# Altium PCB COREV1.1_pcb5_0.PcbDoc (part 1 of 14)
Units mil, origin at the board's own origin, x right, y up, seen from the top; angles counter-clockwise.
Board outline 2860 x 2420 mil, 6 copper layers (Top Layer, GND, SIGNAL_1, SIGNAL_2, POWER, Bottom Layer); 110 components, 241 nets, 882 pads, 697 vias.
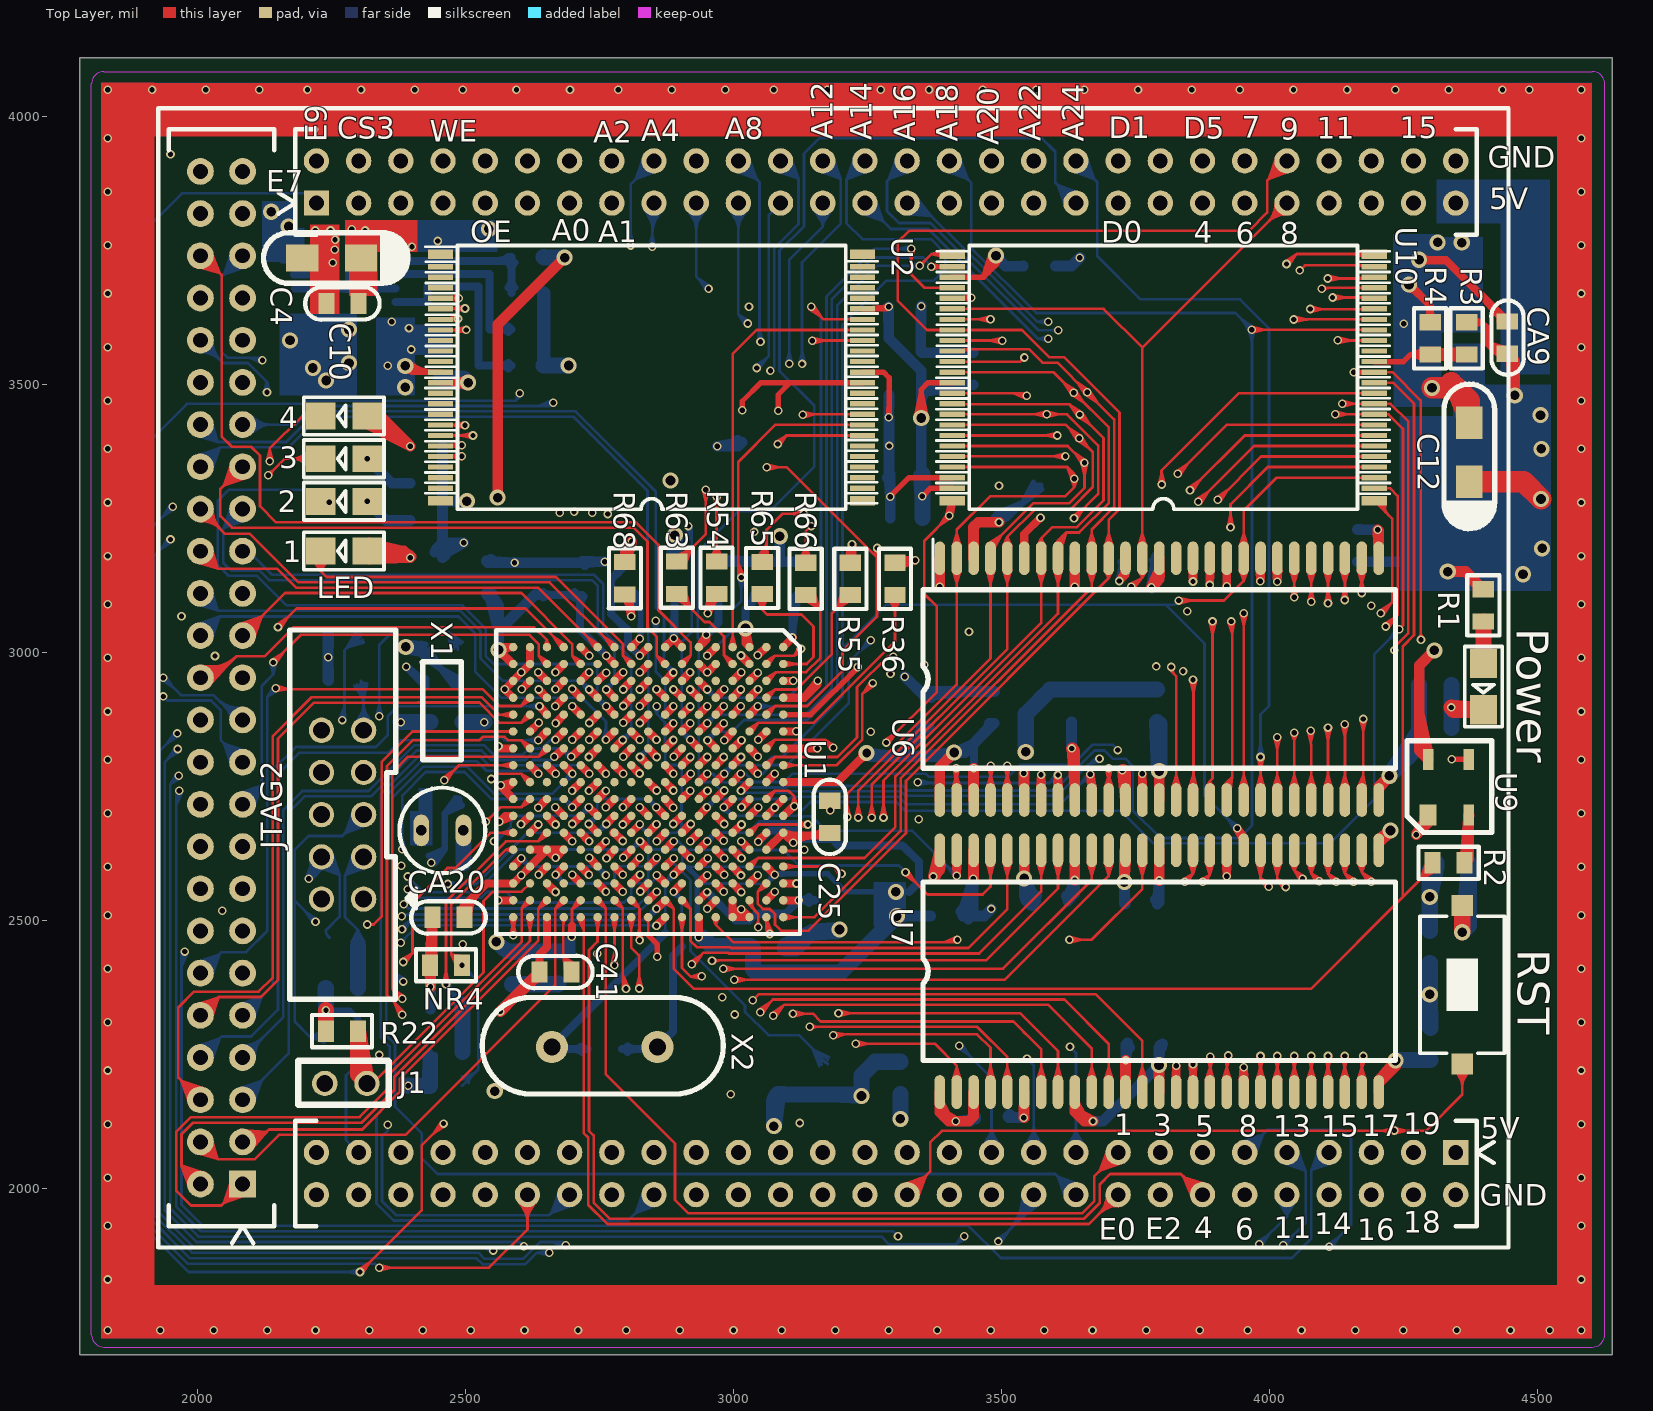
[diagram p0: Top Layer view]
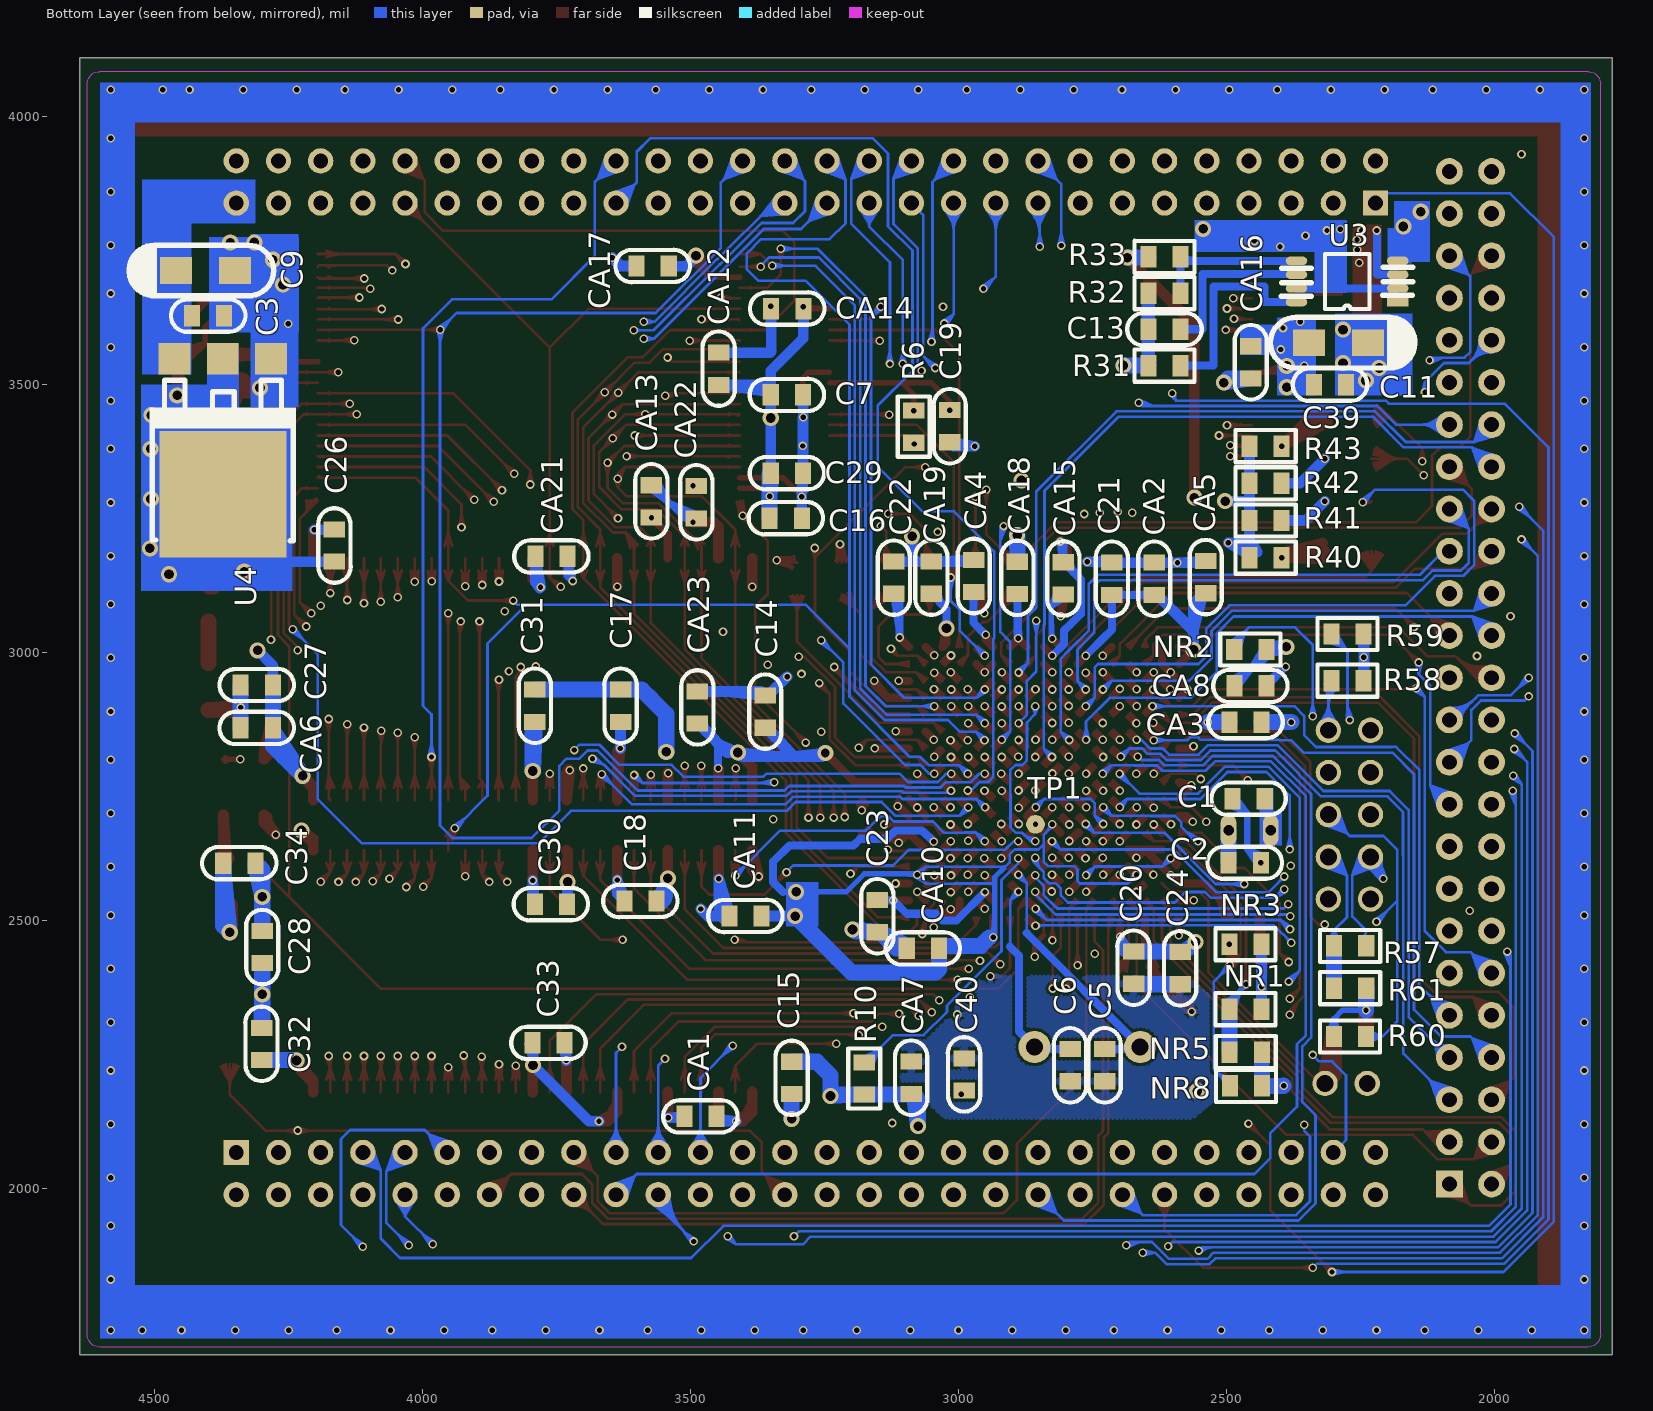
[diagram p1: Bottom Layer view, seen from below]
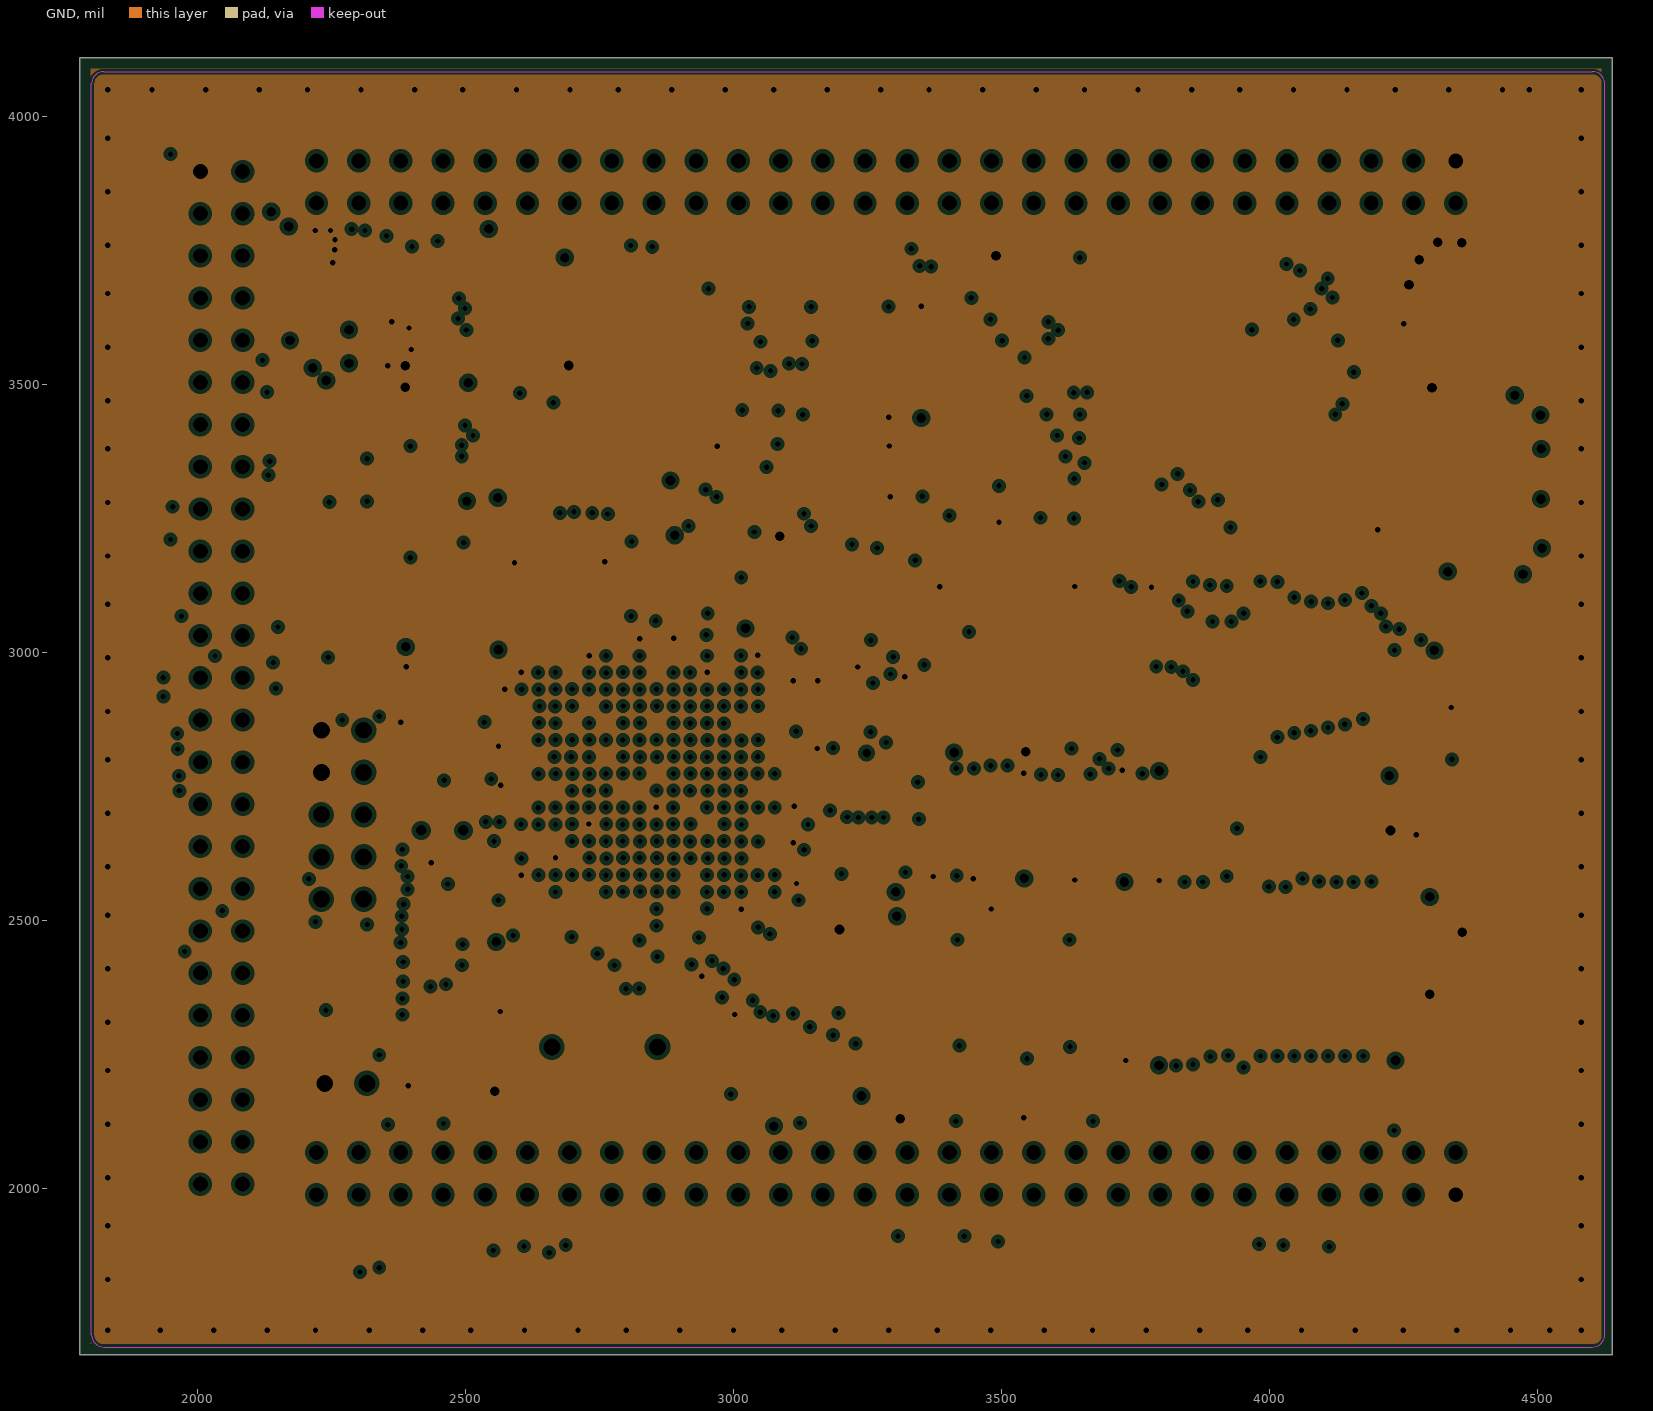
[diagram p2: GND, clearances drawn from the general rule]
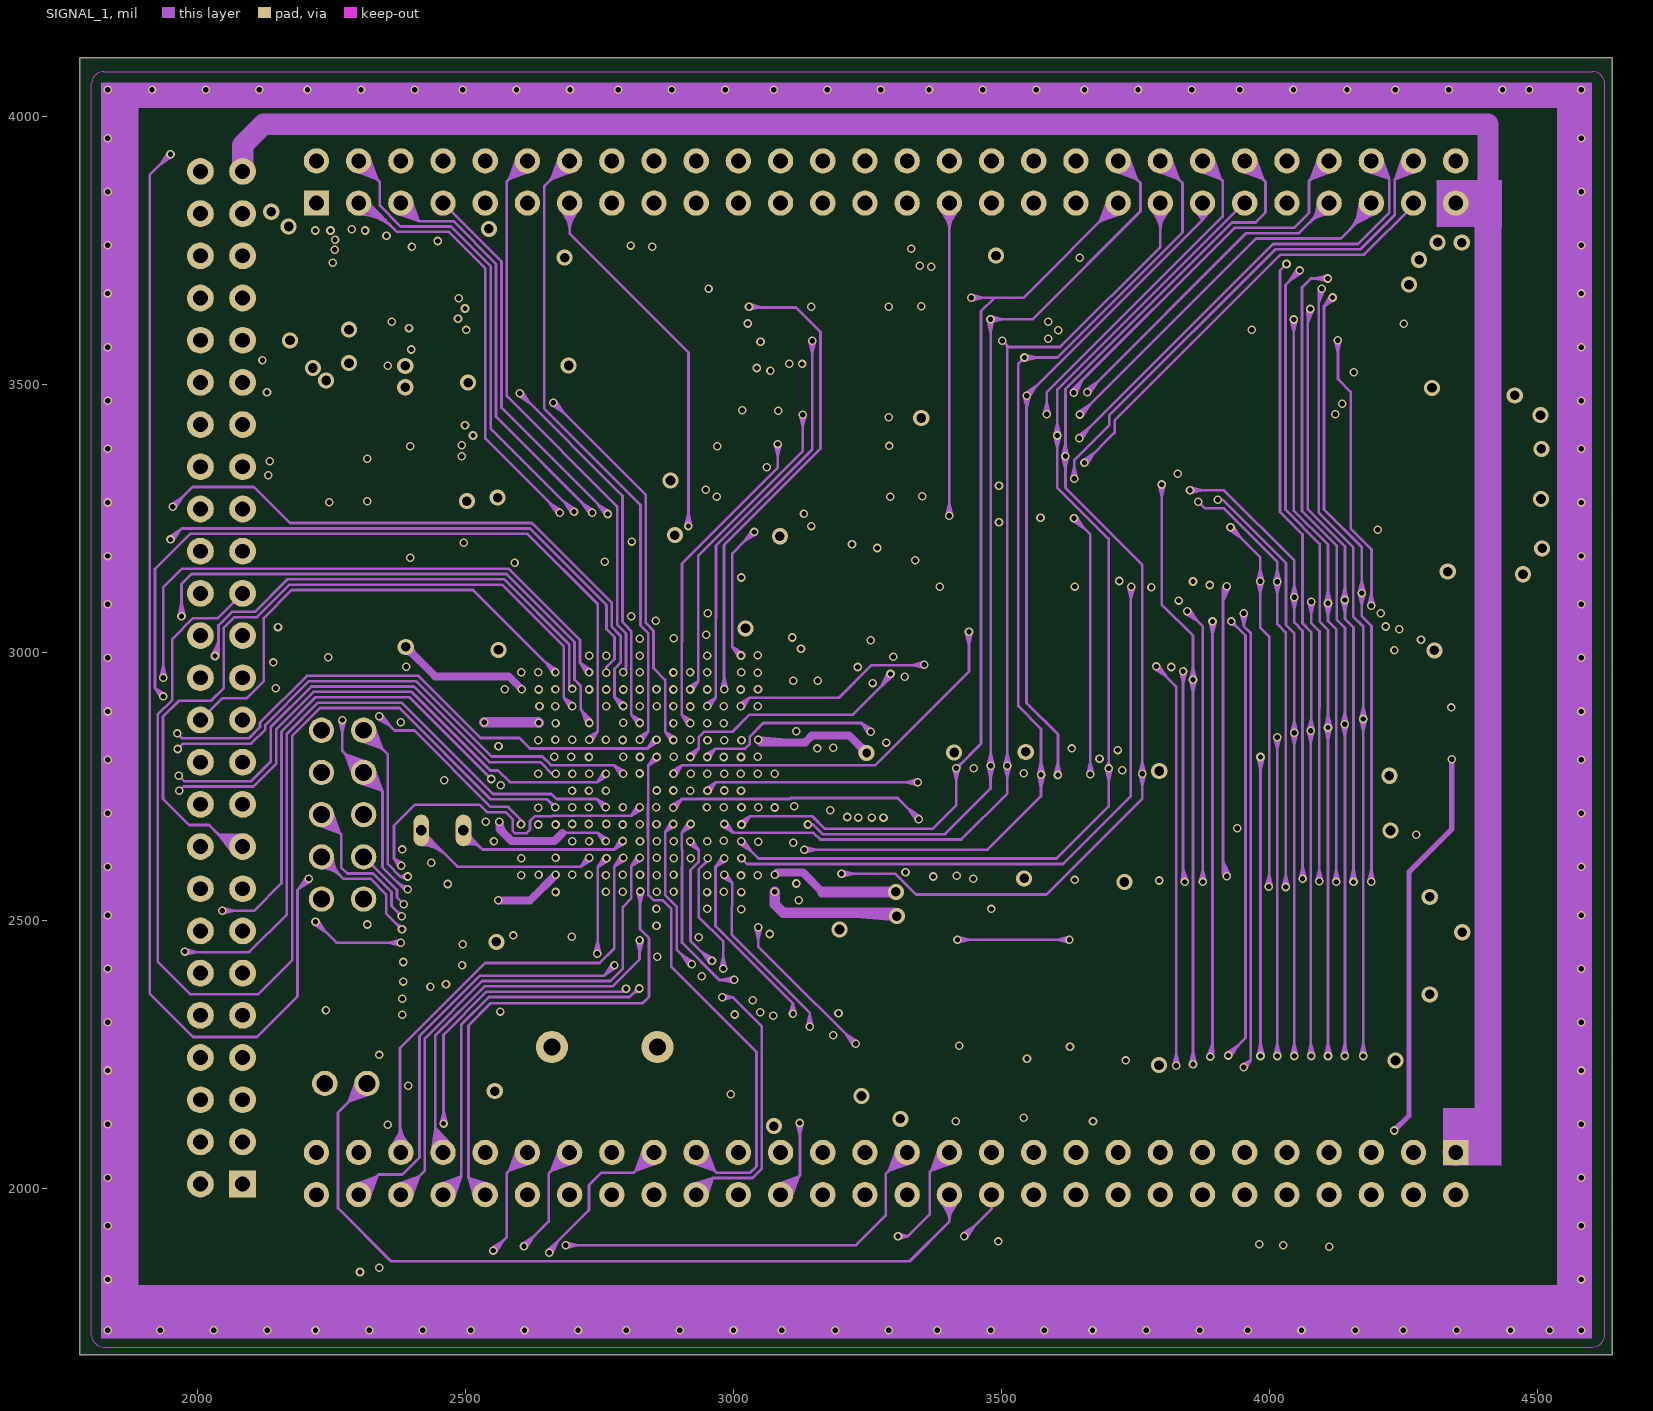
[diagram p3: SIGNAL_1]
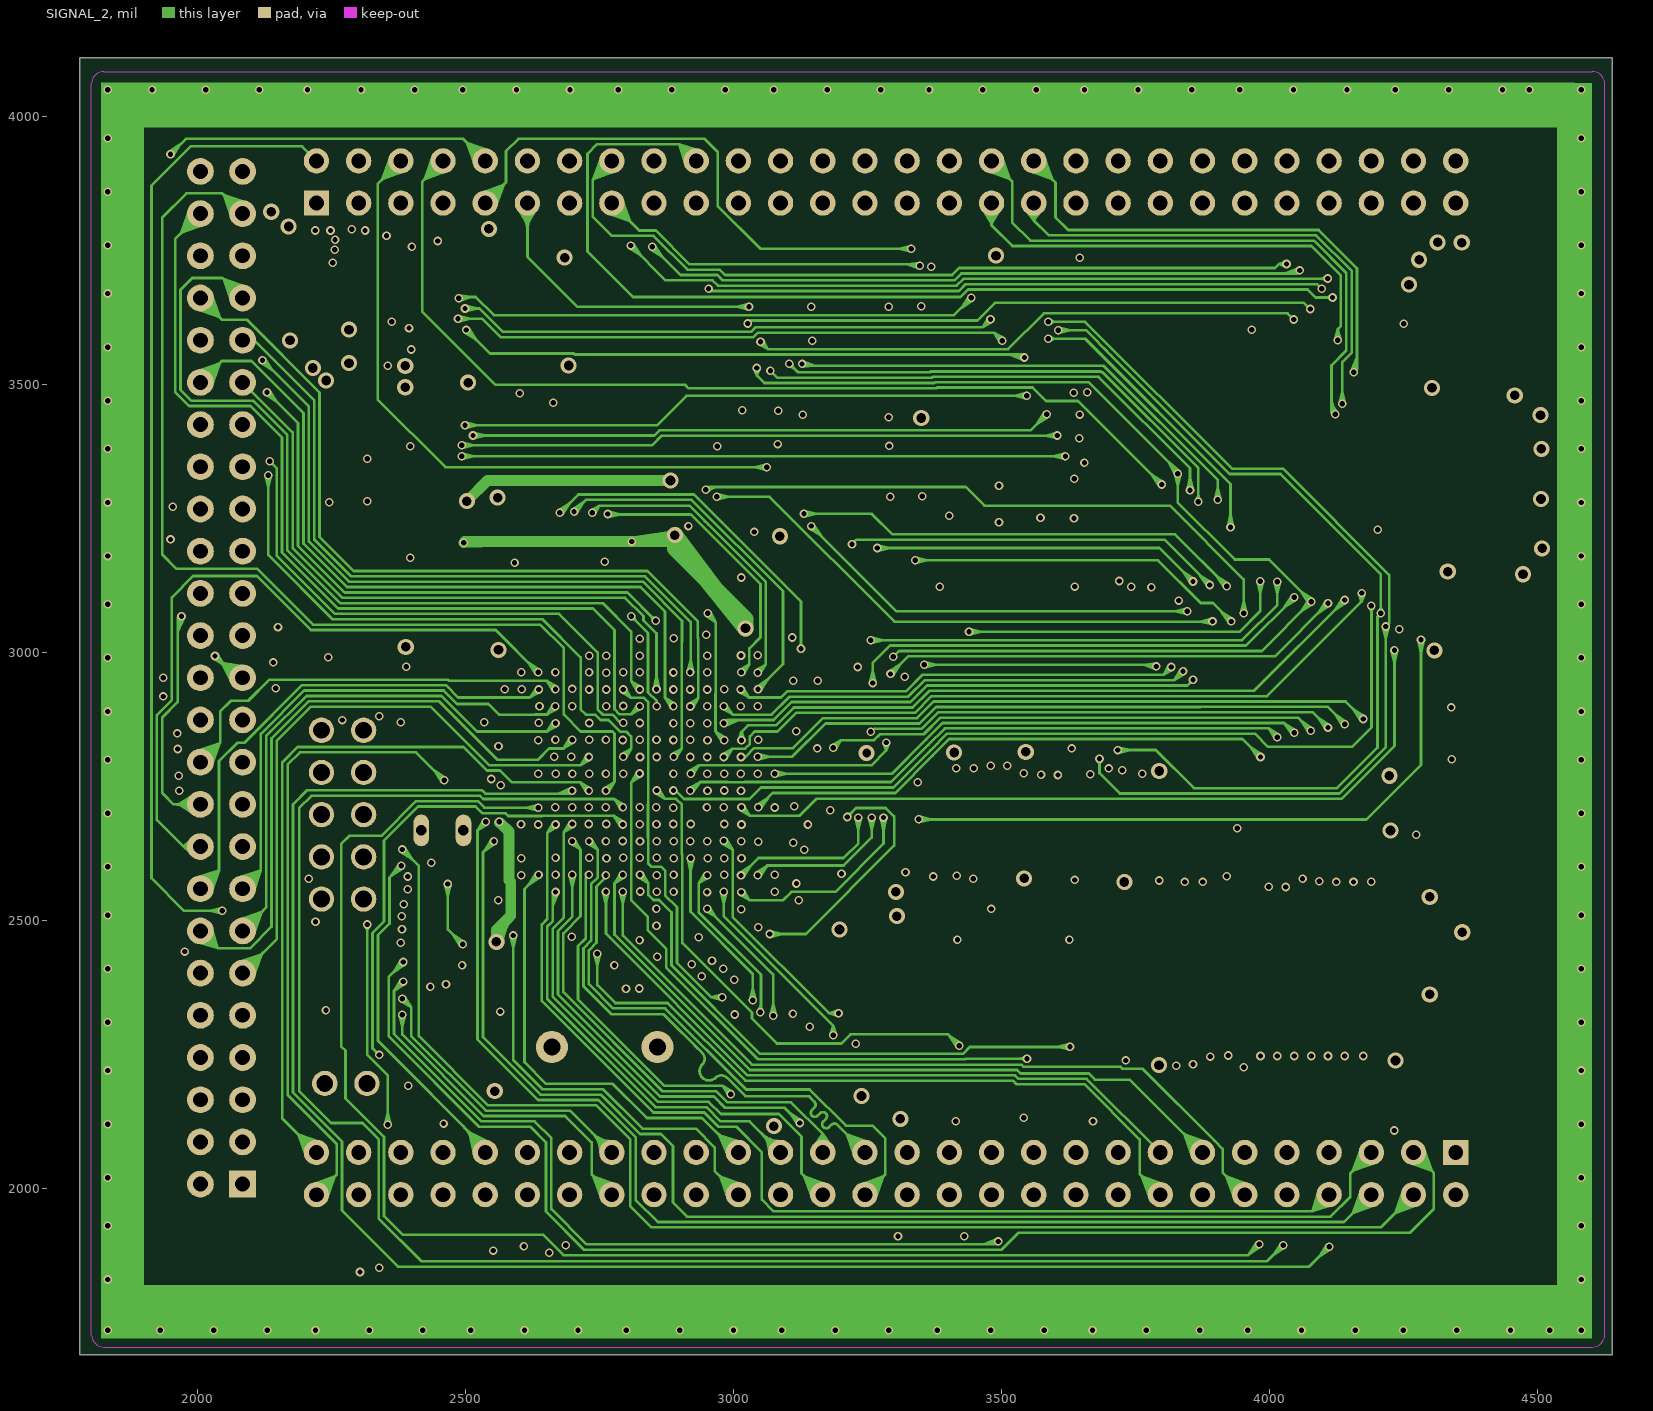
[diagram p4: SIGNAL_2]
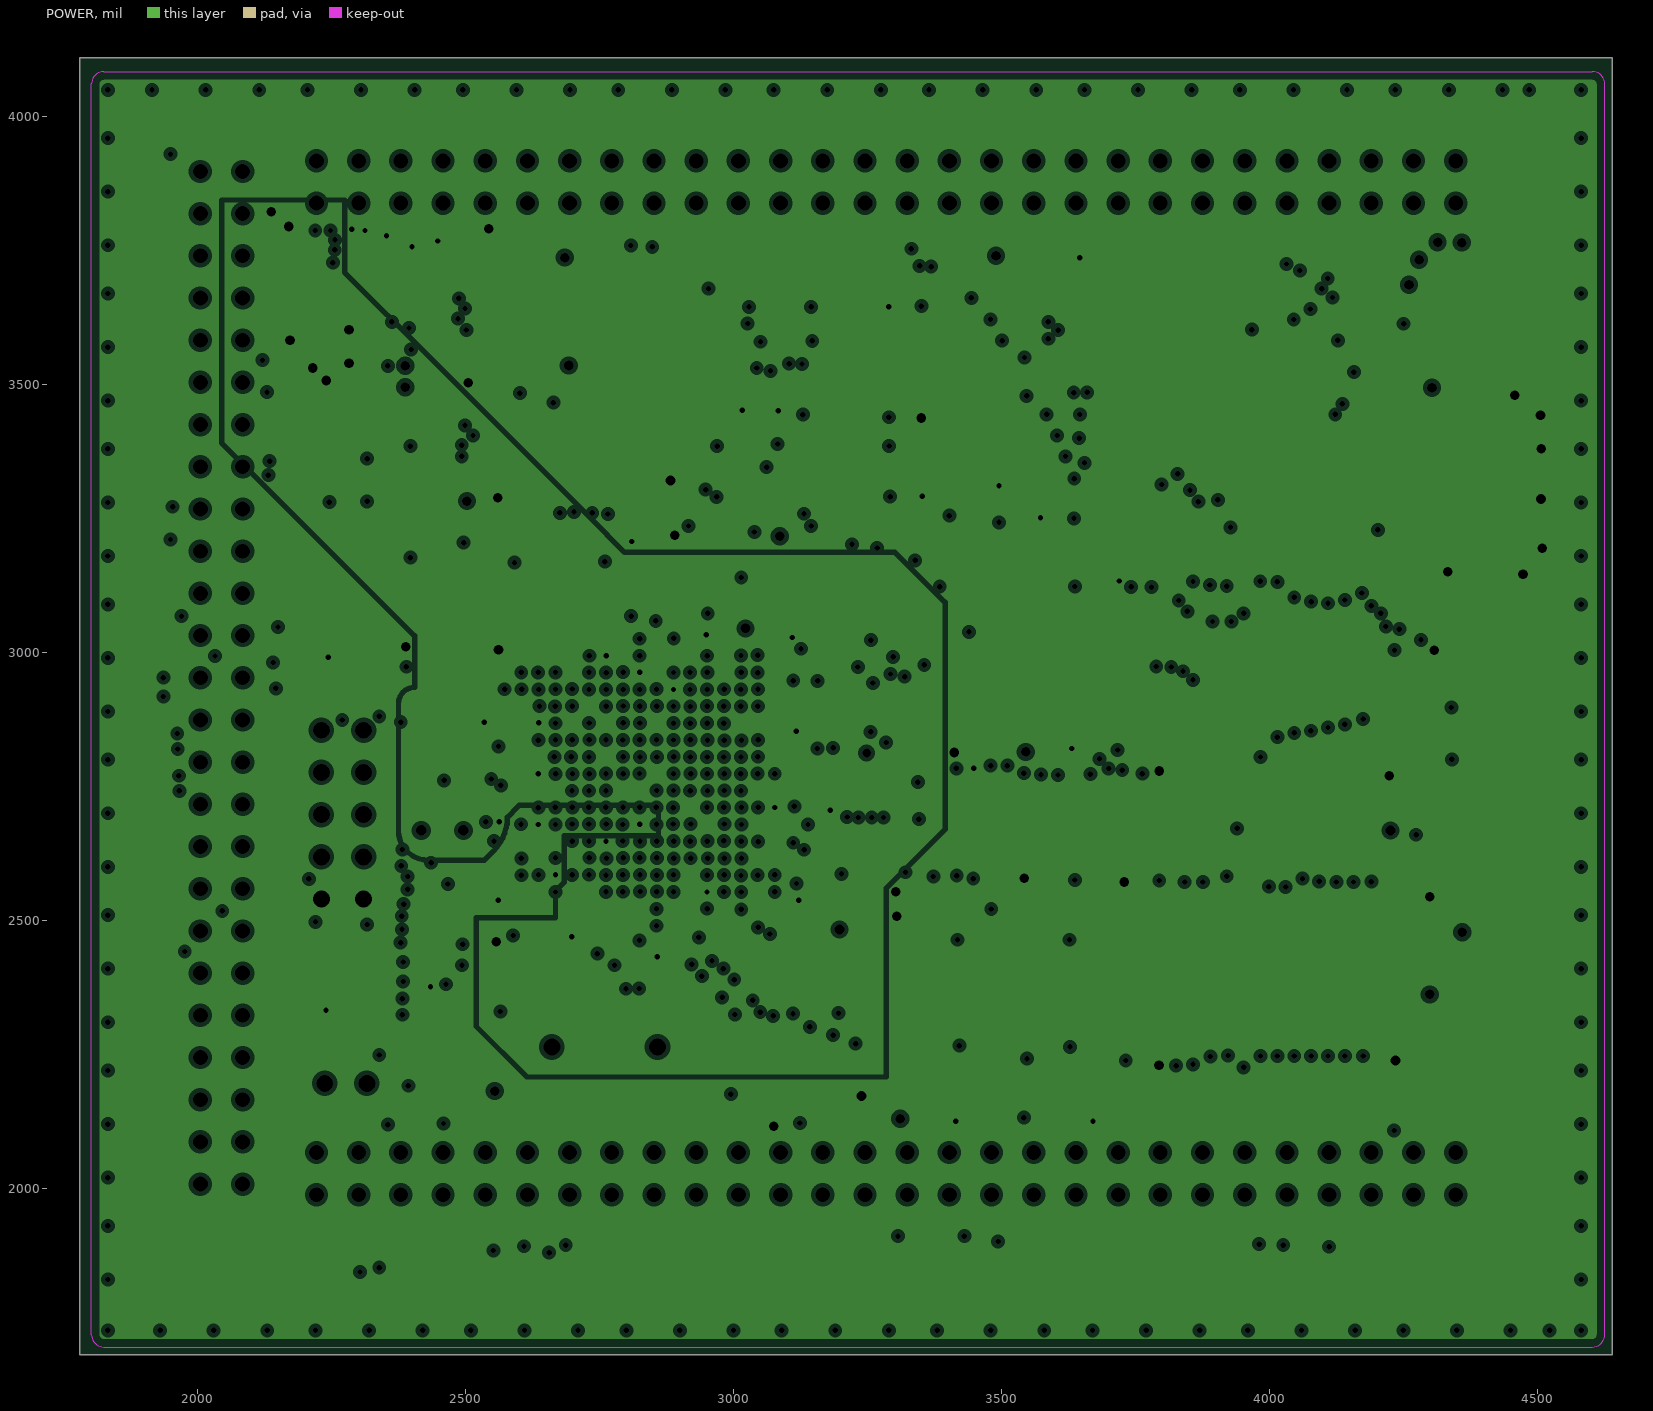
[diagram p5: POWER, clearances drawn from the general rule]

## Layer stack, top to bottom
Top Layer: signal copper 1.4
Dielectric: core 12.6, FR-4, Dk 4.8
GND: plane copper 1.4, net GND
Dielectric: prepreg 12.6, FR-4, Dk 4.8
SIGNAL_1: signal copper 1.4
Dielectric: core 12.6, FR-4, Dk 4.8
SIGNAL_2: signal copper 1.4
Dielectric: prepreg 12.6, FR-4, Dk 4.8
POWER: plane copper 1.4, net (Multiple Nets)
Dielectric: core 12.6, FR-4, Dk 4.8
Bottom Layer: signal copper 1.4

## Board outline
1780,4110 1780,3870 1780,1690 2080,1690 4640,1690 4640,1920 4640,4110

## Design rules (kind name [scope] priority, off if disabled: settings)
Clearance [All] p1: gap=5
ComponentClearance [All vs InNet('No Net')] p1: gap=10 collisioncheckmode=3 verticalgap=10 showdistances=FALSE
FabricationTestPointUsage TestPointUsage [All] p1: valid=0 allowmultiple=FALSE
FabricationTestpoint Testpoint [(IsPad And (OnTopLayer Or OnBottomLayer))] p1: side=3 testpointundercomponent=TRUE minsize=40 maxsize=100 preferedsize=60 minholesize=20 maxholesize=40 preferedholesize=32 testpointgrid=1 allowsidetop=TRUE allowsidebottom=TRUE usegrid=TRUE gridtolerance=0.01
ParallelSegment [All] p1: limit=70503.27 gap=5
PlaneClearance PlaneClearance_1 [(InNet('VDD33V') AND IsPolygon)] p1: clearance=30
PlaneClearance [All] p2: clearance=8
PlaneConnect [All] p1: planeconnectstyle=Direct reliefexpansion=10 reliefentries=4 reliefconductorwidth=10 reliefairgap=5
PolygonConnect [All] p1: connectstyle=Relief reliefconductorwidth=10 reliefentries=4 polygonreliefangle="90 Angle"
RoutingLayers [All] p1: top layer_v5=FALSE mid layer 1_v5=FALSE mid layer 2_v5=FALSE bottom layer_v5=FALSE
RoutingVias 33V [InNet('VDD33V')] p1: holewidth=28 width=50 viastyle="Through Hole" minholewidth=10 minwidth=16 maxholewidth=18 maxwidth=30
RoutingVias RoutingVias_1 [InNet('GND')] p2: holewidth=28 width=45 viastyle="Through Hole" minholewidth=10 minwidth=16 maxholewidth=18 maxwidth=30
RoutingVias [All] p3: holewidth=10 width=16 viastyle="Through Hole" minholewidth=10 minwidth=16 maxholewidth=30 maxwidth=50
SilkscreenOverComponentPads [All] p1: minsilkscreentomaskgap=10
SolderMaskExpansion [All] p1: expansion=4
Width Width_1 [InNet('VDD1.25V') And InNet('VDD33V') And InNet('GND') And InNet('VDD5V')] p1: maxlimit=50 minlimit=5 preferedwidth=12
Width [All] p2: maxlimit=50 minlimit=5 preferedwidth=5
21 further rules are at their usual default settings.

## Classes and differential pairs
net class Data: LDATA0 LDATA1 LDATA2 LDATA3 LDATA4 LDATA5 LDATA6 LDATA7 LDATA8 LDATA9 LDATA10 LDATA11 LDATA12 LDATA13 LDATA14 LDATA15 LDATA16 LDATA17 LDATA18 LDATA19 LDATA20 LDATA21 LDATA22 LDATA23 LDATA24 LDATA25 LDATA26 LDATA27 LDATA28 LDATA29 LDATA30 LDATA31
net class Addr: LADDR0 LADDR1 LADDR2 LADDR3 LADDR4 LADDR5 LADDR6 LADDR7 LADDR8 LADDR9 LADDR10 LADDR11 LADDR12 LADDR13 LADDR14 LADDR15 LADDR16 LADDR17 LADDR18 LADDR19 LADDR20 LADDR21 LADDR22 LADDR23 LADDR24 LADDR25
component class 01-CPU1: C1 C2 C5 C6 C34 C40 C41 J1 R2 R22 R68 RST U1 U9 X1 X2
component class 02-CPU2: 1 2 3 4 JTAG2 NR1 NR2 NR3 NR4 NR5 NR8 R36 R40 R41 R42 R43 R54 R55 R57 R58 R59 R60 R61 R63 R65 R66
component class 03-CPU3: C1 C3 C4 C5 C6 C7 C9 C11 C12 C13 C14 C15 C16 C17 C18 C19 C20 C21 C22 C23 C24 C25 C29 C39 C40 C41 CA1 CA2 CA3 CA4 CA5 CA6 CA7 CA8 CA9 CA10 CA11 CA12 CA13 CA14 CA15 CA16 CA17 CA18 CA19 CA20 CA21 CA22 CA23 Power R1 R2 R10 R22 R31 R32 R33 TP1 U3 U4 U6 U7
component class 04-MEM: C3 C9 C10 C18 C24 C26 C27 C28 C29 C30 C31 C32 C33 CAT2440 R3 R4 R6 R54 R63 R66 U1 U2 U3 U6 U7 U9 U10
net class SDRAM_CTL: LNSCAS LNSCS0 LNSRAS LNWBE0 LNWBE1 LNWBE2 LNWBE3 LNWE LSCKE LSCLK0 LSCLK1

## Components (designator, comment, footprint, x,y, rotation, side; value= is the part's Value field where it differs from the comment)
1 "GREEN" LED 2315.5,3189 r180 top locked (schematic designator LED1)
2 "GREEN" LED 2315.5,3281.67 r180 top locked (schematic designator LED2)
3 "GREEN" LED 2315.5,3361.33 r180 top locked (schematic designator LED3)
4 "GREEN" LED 2315.5,3441 r180 top locked (schematic designator LED4)
C1 "22p" 0603A 2429,2728 r0 bottom locked
C2 "22p" 0603A 2495.5,2607 r180 bottom locked
C3 "100nF" 0603A 4430,3628 r180 bottom locked
C4 "10uF/10V" 3216A 2306,3737 r0 top locked
C5 "15p" 0603A 2728,2259.5 r270 bottom locked
C6 "15p" 0603A 2792.5,2259.5 r270 bottom locked
C7 "100nF" 0603A 3350,3480 r180 bottom locked
C9 "10uF" 3216A 4461,3712 r0 bottom locked
C10 "0.1uF" 0603A 2300,3652 r180 top locked
C11 "10uF/10V" 3216A 2235,3579 r180 bottom locked
C12 "10uF" 3216A 4374,3318 r270 top locked
C13 "33nF/6.3V" 0603A 2585.88,3603.92 r0 bottom locked
C14 "100nF" 0603A 3360,2860 r90 bottom locked
C15 "100nF" 0603A 3312,2236 r270 bottom locked
C16 "100nF" 0603A 3352,3250 r180 bottom locked
C17 "100nF" 0603A 3630,2871 r90 bottom locked
C18 "100nF" 0603A 3564,2537 r0 bottom locked
C19 "100nF" 0603A 3017,3452 r270 bottom locked
C20 "100nF" 0603A 2674,2441.5 r270 bottom locked
C21 "100nF" 0603A 2713.2,3108 r90 bottom locked
C22 "100nF" 0603A 3120,3110 r90 bottom locked
C23 "100nF" 0603A 3152.07,2537.66 r270 bottom locked
C24 "100nF" 0603A 2587,2440.5 r270 bottom locked
C25 "100nF" 0603A 3179,2723 r270 top
C26 "100nF" 0603A 4164,3170 r90 bottom locked
C27 "100nF" 0603A 4280,2940 r0 bottom locked
C28 "100nF" 0603A 4300,2480 r270 bottom locked
C29 "100nF" 0603A 3350,3334 r180 bottom locked
C30 "100nF" 0603A 3731,2531 r0 bottom locked
C31 "100nF" 0603A 3790,2871 r90 bottom locked
C32 "100nF" 0603A 4300,2240 r90 bottom locked
C33 "100nF" 0603A 3795,2271 r180 bottom locked
C34 "104" 0603A 4312.5,2607.59 r0 bottom locked
C39 "100nF" 0603A 2277,3500.5 r0 bottom locked
C40 "2n7" 0603A 2989,2183 r90 bottom locked
C41 "680p" 0603A 2697.5,2404.5 r180 top
CA1 "100nF" 0603A 3452,2135 r0 bottom locked
CA2 "100nF" 0603A 2634.09,3108 r90 bottom locked
CA3 "100nF" 0603A 2494.23,2869.5 r180 bottom locked
CA4 "100nF" 0603A 2971,3113 r90 bottom locked
CA5 "100nF" 0603A 2538,3111 r90 bottom locked
CA6 "100nF" 0603A 4280,2860 r0 bottom locked
CA7 "100nF" 0603A 3087.75,2176.89 r90 bottom
CA8 "100nF" 0603A 2485,2937 r180 bottom
CA9 "100nF" 0603A 4445,3558 r90 top locked
CA10 "100nF" 0603A 3037,2448.5 r0 bottom locked
CA11 "100nF" 0603A 3368,2509 r0 bottom locked
CA12 "100nF" 0603A 3447,3500 r90 bottom locked
CA13 "100nF" 0603A 3572.5,3252.5 r90 bottom locked
CA14 "100nF" 0603A 3290,3642.5 r0 bottom locked
CA15 "100nF" 0603A 2805,3168 r270 bottom locked
CA16 "100nF" 0603A 2454,3512 r90 bottom locked
CA17 "100nF" 0603A 3600.39,3720.65 r180 bottom locked
CA18 "100nF" 0603A 2891,3169 r270 bottom locked
CA19 "100nF" 0603A 3050,3110 r90 bottom locked
CA20 "100nF" 0603A 2438.5,2505 r0 top locked
CA21 "100nF" 0603A 3730,3180 r0 bottom locked
CA22 "100nF" 0603A 3490,3310 r270 bottom locked
CA23 "100nF" 0603A 3486.61,2867.85 r90 bottom locked
J1 "CON2" SIP2S 2315,2196 r180 top locked
JTAG2 "HEADER 5X2" IDC10S 2310,2540 r90 top locked
NR1 "10K" 0603R 2434,2333 r0 bottom locked
NR2 "10K" 0603R 2425,3004 r0 bottom
NR3 "10K" 0603R 2434,2454 r0 bottom locked
NR4 "10K" 0603R 2433,2418 r0 top locked
NR5 "1K" 0603R 2494.5,2255.91 r180 bottom locked
NR8 "1K" 0603R 2494,2193 r180 bottom locked
Power "RED" LED 4400,2979 r270 top locked
R1 "330" 0603R 4401,3118.5 r270 top locked
R2 "470" 0603R 4365,2606 r180 top locked
R3 "10K" 0603R 4369.86,3616.77 r270 top locked
R4 "10K" 0603R 4298.5,3555.77 r90 top locked
R6 "10K" 0603R 3082,3452 r270 bottom locked
R10 "15K" 0603R 3177.5,2174.5 r90 bottom
R22 "4.7K" 0603R 2239,2295 r0 top locked
R31 "0" 0603R 2646.11,3537 r180 bottom locked
R32 "100K(1%)" 0603r 2646.11,3672.22 r180 bottom locked
R33 "10(1%)" 0603r 2585.12,3736.62 r0 bottom locked
R36 "22" 0603R 3303,3168 r270 top locked
R40 "1K" 0603R 2396.55,3175.5 r0 bottom locked
R41 "1K" 0603R 2396.55,3244.83 r0 bottom locked
R42 "1K" 0603R 2396.55,3314.17 r0 bottom locked
R43 "1K" 0603R 2396.55,3383.5 r0 bottom locked
R54 "22" 0603R 2970,3170 r270 top locked
R55 "22" 0603R 3219.67,3168 r270 top locked
R57 "1K" 0603R 2299.68,2454 r180 bottom locked
R58 "10K" 0603R 2243.69,2946 r0 bottom locked
R59 "10K" 0603R 2243.69,3033 r0 bottom locked
R60 "10K" 0603R 2300,2285 r180 bottom locked
R61 "10K" 0603R 2238.69,2372 r0 bottom locked
R63 "22" 0603R 2896,3170 r270 top locked
R65 "22" 0603R 3055,3169.61 r270 top locked
R66 "22" 0603R 3136.33,3168 r270 top locked
R68 "4.7K" 0603R 2799.06,3169.12 r270 top locked
RST "SW-PB" SW-PB2 4360,2380 r90 top locked
TP1 "CON1" TP1 2840,2600 r90 bottom locked
U1 "S3C2440X" BGA289 3092.5,3010 r270 top locked
U2 "K9Fxx08" TSOP48 3240,3287.5 r180 top locked
U3 "MAX8860EUA18" MSOP8 2181,3654 r0 bottom locked
U4 "LM1117-33" TO-252 4463,3548 r0 bottom locked
U6 "HY57V561620FTP-H" TSOP54 3385,2725 r90 top locked
U7 "HY57V561620FTP-H" TSOP54 3385,2180 r90 top locked
U9 "MAX811" MAX811 4296,2749 r90 top locked
U10 "AM29LV160DB/SST39VF1601" TSOP48 4195,3287.5 r180 top locked
X1 "32.768kHz" XTAL-B 2456,2668 r180 top locked
X2 "12M" OSC2PR-1 2858,2264 r180 top locked

## Footprints (in the part's own frame and the unit in brackets; to place one, negate y for a bottom-side part, rotate by r counter-clockwise, add the part's x,y. Pads: shape width x height; smd on the part's side, far side on the other; paste and mask are expansions set on the pad)
0603A [mil]
  rect 30x40 smd: 1(-0.39,0.65) 2(59.61,0.65)
  silkscreen extent -40,-30 99,31
0603R [mil]
  rect 30x40 smd: 1(0.5,-1.59) 2(60.5,-1.59)
  silkscreen extent -26,-32 87,28
0603r [mil]
  rect 30x40 smd: 1(0.5,-1.59) 2(60.5,-1.59)
  silkscreen extent -26,-32 87,28
3216A [mil]
  rect 60x50 smd: 1(-0.8,-0.83) 2(-110.8,-0.83)
  silkscreen extent -183,-48 87,46
BGA289 [mm]
  round 0.4 smd: A1(-0.003,0.009) A2(0.797,0.009) A3(1.597,0.009) A4(2.397,0.009) A5(3.197,0.009) A6(3.997,0.009) A7(4.797,0.009) A8(5.597,0.009) A9(6.397,0.009) A10(7.197,0.009) A11(7.997,0.009) A12(8.797,0.009) A13(9.597,0.009) A14(10.397,0.009) A15(11.197,0.009) A16(11.997,0.009) A17(12.797,0.009) B1(-0.003,-0.791) B2(0.797,-0.791) B3(1.597,-0.791) B4(2.397,-0.791) B5(3.197,-0.791) B6(3.997,-0.791) B7(4.797,-0.791) B8(5.597,-0.791) B9(6.397,-0.791) B10(7.197,-0.791) B11(7.997,-0.791) B12(8.797,-0.791) B13(9.597,-0.791) B14(10.397,-0.791) B15(11.197,-0.791) B16(11.997,-0.791) B17(12.797,-0.791) C1(-0.003,-1.591) C2(0.797,-1.591) C3(1.597,-1.591) C4(2.397,-1.591) C5(3.197,-1.591) C6(3.997,-1.591) C7(4.797,-1.591) C8(5.597,-1.591) C9(6.397,-1.591) C10(7.197,-1.591) C11(7.997,-1.591) C12(8.797,-1.591) C13(9.597,-1.591) C14(10.397,-1.591) C15(11.197,-1.591) C16(11.997,-1.591) C17(12.797,-1.591) D1(-0.003,-2.391) D2(0.797,-2.391) D3(1.597,-2.391) D4(2.397,-2.391) D5(3.197,-2.391) D6(3.997,-2.391) D7(4.797,-2.391) D8(5.597,-2.391) D9(6.397,-2.391) D10(7.197,-2.391) D11(7.997,-2.391) D12(8.797,-2.391) D13(9.597,-2.391) D14(10.397,-2.391) D15(11.197,-2.391) D16(11.997,-2.391) D17(12.797,-2.391) E1(-0.003,-3.191) E2(0.797,-3.191) E3(1.597,-3.191) E4(2.397,-3.191) E5(3.197,-3.191) E6(3.997,-3.191) E7(4.797,-3.191) E8(5.597,-3.191) E9(6.397,-3.191) E10(7.197,-3.191) E11(7.997,-3.191) E12(8.797,-3.191) E13(9.597,-3.191) E14(10.397,-3.191) E15(11.197,-3.191) E16(11.997,-3.191) E17(12.797,-3.191) F1(-0.003,-3.991) F2(0.797,-3.991) F3(1.597,-3.991) F4(2.397,-3.991) F5(3.197,-3.991) F6(3.997,-3.991) F7(4.797,-3.991) F8(5.597,-3.991) F9(6.397,-3.991) F10(7.197,-3.991) F11(7.997,-3.991) F12(8.797,-3.991) F13(9.597,-3.991) F14(10.397,-3.991) F15(11.197,-3.991) F16(11.997,-3.991) F17(12.797,-3.991) G1(-0.003,-4.791) G2(0.797,-4.791) G3(1.597,-4.791) G4(2.397,-4.791) G5(3.197,-4.791) G6(3.997,-4.791) G7(4.797,-4.791) G8(5.597,-4.791) G9(6.397,-4.791) G10(7.197,-4.791) G11(7.997,-4.791) G12(8.797,-4.791) G13(9.597,-4.791) G14(10.397,-4.791) G15(11.197,-4.791) G16(11.997,-4.791) G17(12.797,-4.791) H1(-0.003,-5.591) H2(0.797,-5.591) H3(1.597,-5.591) H4(2.397,-5.591) H5(3.197,-5.591) H6(3.997,-5.591) H7(4.797,-5.591) H8(5.597,-5.591) H9(6.397,-5.591) H10(7.197,-5.591) H11(7.997,-5.591) H12(8.797,-5.591) H13(9.597,-5.591) H14(10.397,-5.591) H15(11.197,-5.591) H16(11.997,-5.591) H17(12.797,-5.591) J1(-0.003,-6.391) J2(0.797,-6.391) J3(1.597,-6.391) J4(2.397,-6.391) J5(3.197,-6.391) J6(3.997,-6.391) J7(4.797,-6.391) J8(5.597,-6.391) J9(6.397,-6.391) J10(7.197,-6.391) J11(7.997,-6.391) J12(8.797,-6.391) J13(9.597,-6.391) J14(10.397,-6.391) J15(11.197,-6.391) J16(11.997,-6.391) J17(12.797,-6.391) K1(-0.003,-7.191) K2(0.797,-7.191) K3(1.597,-7.191) K4(2.397,-7.191) K5(3.197,-7.191) K6(3.997,-7.191) K7(4.797,-7.191) K8(5.597,-7.191) K9(6.397,-7.191) K10(7.197,-7.191) K11(7.997,-7.191) K12(8.797,-7.191) K13(9.597,-7.191) K14(10.397,-7.191) K15(11.197,-7.191) K16(11.997,-7.191) K17(12.797,-7.191) L1(-0.003,-7.991) L2(0.797,-7.991) L3(1.597,-7.991) L4(2.397,-7.991) L5(3.197,-7.991) L6(3.997,-7.991) L7(4.797,-7.991) L8(5.597,-7.991) L9(6.397,-7.991) L10(7.197,-7.991) L11(7.997,-7.991) L12(8.797,-7.991) L13(9.597,-7.991) L14(10.397,-7.991) L15(11.197,-7.991) L16(11.997,-7.991) L17(12.797,-7.991) M1(-0.003,-8.791) M2(0.797,-8.791) M3(1.597,-8.791) M4(2.397,-8.791) M5(3.197,-8.791) M6(3.997,-8.791) M7(4.797,-8.791) M8(5.597,-8.791) M9(6.397,-8.791) M10(7.197,-8.791) M11(7.997,-8.791) M12(8.797,-8.791) M13(9.597,-8.791) M14(10.397,-8.791) M15(11.197,-8.791) M16(11.997,-8.791) M17(12.797,-8.791) N1(-0.003,-9.591) N2(0.797,-9.591) N3(1.597,-9.591) N4(2.397,-9.591) N5(3.197,-9.591) N6(3.997,-9.591) N7(4.797,-9.591) N8(5.597,-9.591) N9(6.397,-9.591) N10(7.197,-9.591) N11(7.997,-9.591) N12(8.797,-9.591) N13(9.597,-9.591) N14(10.397,-9.591) N15(11.197,-9.591) N16(11.997,-9.591) N17(12.797,-9.591) P1(-0.003,-10.391) P2(0.797,-10.391) P3(1.597,-10.391) P4(2.397,-10.391) P5(3.197,-10.391) P6(3.997,-10.391) P7(4.797,-10.391) P8(5.597,-10.391) P9(6.397,-10.391) P10(7.197,-10.391) P11(7.997,-10.391) P12(8.797,-10.391) P13(9.597,-10.391) P14(10.397,-10.391) P15(11.197,-10.391) P16(11.997,-10.391) P17(12.797,-10.391) R1(-0.003,-11.191) R2(0.797,-11.191) R3(1.597,-11.191) R4(2.397,-11.191) R5(3.197,-11.191) R6(3.997,-11.191) R7(4.797,-11.191) R8(5.597,-11.191) R9(6.397,-11.191) R10(7.197,-11.191) R11(7.997,-11.191) R12(8.797,-11.191) R13(9.597,-11.191) R14(10.397,-11.191) R15(11.197,-11.191) R16(11.997,-11.191) R17(12.797,-11.191) T1(-0.003,-11.991) T2(0.797,-11.991) T3(1.597,-11.991) T4(2.397,-11.991) T5(3.197,-11.991) T6(3.997,-11.991) T7(4.797,-11.991) T8(5.597,-11.991) T9(6.397,-11.991) T10(7.197,-11.991) T11(7.997,-11.991) T12(8.797,-11.991) T13(9.597,-11.991) T14(10.397,-11.991) T15(11.197,-11.991) T16(11.997,-11.991) T17(12.797,-11.991) U1(-0.003,-12.791) U2(0.797,-12.791) U3(1.597,-12.791) U4(2.397,-12.791) U5(3.197,-12.791) U6(3.997,-12.791) U7(4.797,-12.791) U8(5.597,-12.791) U9(6.397,-12.791) U10(7.197,-12.791) U11(7.997,-12.791) U12(8.797,-12.791) U13(9.597,-12.791) U14(10.397,-12.791) U15(11.197,-12.791) U16(11.997,-12.791) U17(12.797,-12.791)
  silkscreen extent -0.8,-13.59 13.6,0.81
IDC10S [mm]
  round 1.2 hole 0.8: 1(-0.001,0.003) 2(-0.001,2.003) 3(1.999,0.003) 4(1.999,2.003) 5(3.999,0.003) 6(3.999,2.003) 7(5.999,0.003) 8(5.999,2.003) 9(7.999,0.003) 10(7.999,2.003)
  silkscreen extent -4.75,-2.47 12.75,3.5
LED [mm]
  rect 1.4x1.27 smd: 1(-0.025,-0.01) 2(2.185,-0.01)
  silkscreen extent -0.82,-0.9 2.99,0.88
MAX811 [mm]
  rect 1x0.8 smd: 1(-1.327,-0.004)
  rect 1x0.5 smd: 2(-1.327,-1.924) 3(1.313,-1.924) 4(1.313,-0.004)
  silkscreen extent -2.16,-3.03 2.19,1
MSOP8 [mm]
  rect 1.02x0.41 smd: 1(-0.017,-0.002)
  oval 1.02x0.41 smd: 2(-0.017,-0.652) 3(-0.017,-1.302) 4(-0.017,-1.952) 5(4.783,-1.952) 6(4.783,-1.302) 7(4.783,-0.652) 8(4.783,-0.002)
  silkscreen extent 1.33,-2.28 3.44,0.32
OSC2PR-1 [mil]
  round 60 hole 32: 1(-0.1,0.32) 2(196.9,0.32)
  silkscreen extent -123,-92 327,88
SIP2S [mm]
  round 1.2 hole 0.8: 1(-0.027,0.005) 2(1.973,0.005)
  silkscreen extent -1.05,-1.07 3.22,1
SW-PB2 [mm]
  rect 1x1 smd: 1(-3.75,0) 2(3.75,0)
  silkscreen extent -3.25,-2 3.25,2
TO-252 [mm]
  rect 1.5x1.5 smd: 1(0.003,-0.012) 2(-4.569,-0.012) 3(-2.283,-0.012)
  rect 6x6 smd: 4(-2.297,6.413)
  silkscreen extent -5.74,1.01 1.18,8.61
TP1 [mil]
  round 35 smd: 1(79.4,16.4)
TSOP48 [mm]
  rect 1.2x0.45 smd: 1(-0.021,0.113) 24(-0.021,-11.587) 25(19.979,-11.587) 48(19.979,0.113)
  rect 1.2x0.25 smd: 2(-0.021,-0.487) 3(-0.021,-0.987) 4(-0.021,-1.487) 5(-0.021,-1.987) 6(-0.021,-2.487) 7(-0.021,-2.987) 8(-0.021,-3.487) 9(-0.021,-3.987) 10(-0.021,-4.487) 11(-0.021,-4.987) 12(-0.021,-5.487) 13(-0.021,-5.987) 14(-0.021,-6.487) 15(-0.021,-6.987) 16(-0.021,-7.487) 17(-0.021,-7.987) 18(-0.021,-8.487) 19(-0.021,-8.987) 20(-0.021,-9.487) 21(-0.021,-9.987) 22(-0.021,-10.487) 23(-0.021,-10.987) 26(19.979,-10.987) 27(19.979,-10.487) 28(19.979,-9.987) 29(19.979,-9.487) 30(19.979,-8.987) 31(19.979,-8.487) 32(19.979,-7.987) 33(19.979,-7.487) 34(19.979,-6.987) 35(19.979,-6.487) 36(19.979,-5.987) 37(19.979,-5.487) 38(19.979,-4.987) 39(19.979,-4.487) 40(19.979,-3.987) 41(19.979,-3.487) 42(19.979,-2.987) 43(19.979,-2.487) 44(19.979,-1.987) 45(19.979,-1.487) 46(19.979,-0.987) 47(19.979,-0.487)
  silkscreen extent 0.78,-11.99 19.18,0.51
TSOP54 [mm]
  oval 1.6x0.5 smd: 1(-0.007,-0.003) 2(-0.007,-0.803) 3(-0.007,-1.603) 4(-0.007,-2.403) 5(-0.007,-3.203) 6(-0.007,-4.003) 7(-0.007,-4.803) 8(-0.007,-5.603) 9(-0.007,-6.403) 10(-0.007,-7.203) 11(-0.007,-8.003) 12(-0.007,-8.803) 13(-0.007,-9.603) 14(-0.007,-10.403) 15(-0.007,-11.203) 16(-0.007,-12.003) 17(-0.007,-12.803) 18(-0.007,-13.603) 19(-0.007,-14.403) 20(-0.007,-15.203) 21(-0.007,-16.003) 22(-0.007,-16.803) 23(-0.007,-17.603) 24(-0.007,-18.403) 25(-0.007,-19.203) 26(-0.007,-20.003) 27(-0.007,-20.803) 28(11.453,-20.803) 29(11.453,-20.003) 30(11.453,-19.203) 31(11.453,-18.403) 32(11.453,-17.603) 33(11.453,-16.803) 34(11.453,-16.003) 35(11.453,-15.203) 36(11.453,-14.403) 37(11.453,-13.603) 38(11.453,-12.803) 39(11.453,-12.003) 40(11.453,-11.203) 41(11.453,-10.403) 42(11.453,-9.603) 43(11.453,-8.803) 44(11.453,-8.003) 45(11.453,-7.203) 46(11.453,-6.403) 47(11.453,-5.603) 48(11.453,-4.803) 49(11.453,-4.003) 50(11.453,-3.203) 51(11.453,-2.403) 52(11.453,-1.603) 53(11.453,-0.803) 54(11.453,-0.003)
  silkscreen extent 1.49,-21.6 9.95,0.8
XTAL-B [mm]
  oval 0.75x1.5 hole 0.5: 1(-1.02,0.001) 2(0.98,0.001)
  silkscreen extent -2.05,-8 2.01,2.03

## Part data
1 2 3 4 Power: library part LED
C1 C2 C3 C5 C6 C7 C10 C13 C14 C15 C16 C17 C18 C19 C20 C21 C22 C23 C24 C25 C26 C27 C28 C29 C30 C31 C32 C33 C34 C39 C40 C41 CA1 CA2 CA3 CA4 CA5 CA6 CA7 CA8 CA9 CA10 CA11 CA12 CA13 CA14 CA15 CA16 CA17 CA18 CA19 CA20 CA21 CA22 CA23: library part CAP, "Capacitor"
C4 C9 C11 C12: library part CAPACITOR, "Capacitor"
J1 TP1: "Connector"
NR1 NR2 NR3 NR4 NR5 NR8 R3 R4 R6 R10 R36 R40 R41 R42 R43 R54 R55 R57 R58 R59 R60 R61 R63 R65 R66: library part RES
R1 R2 R22 R31 R32 R33 R68: library part RES1
U2: library part K9F2808
U3: library part LP3982IMM-1.8
U6 U7: library part K4S561632C
U10: library part FLASH
X1 X2: library part CRYSTAL

## Free pads (board coordinates)
  rect 47.24x47.24 hole 27.56: PA1(4347.78,2067.06) PC1(2221.8,3838.71)
  round 47.24 hole 27.56: PA2(4347.78,1988.32) PA3(4269.04,2067.06) PA4(4269.04,1988.32) PA5(4190.3,2067.06) PA6(4190.3,1988.32) PA7(4111.56,2067.06) PA8(4111.56,1988.32) PA9(4032.82,2067.06) PA10(4032.82,1988.32) PA11(3954.08,2067.06) PA12(3954.08,1988.32) PA13(3875.34,2067.06) PA14(3875.34,1988.32) PA15(3796.6,2067.06) PA16(3796.6,1988.32) PA17(3717.86,2067.06) PA18(3717.86,1988.32) PA19(3639.12,2067.06) PA20(3639.12,1988.32) PA21(3560.38,2067.06) PA22(3560.38,1988.32) PA23(3481.64,2067.06) PA24(3481.64,1988.32) PA25(3402.9,2067.06) PA26(3402.9,1988.32) PA27(3324.16,2067.06) PA28(3324.16,1988.32) PA29(3245.42,2067.06) PA30(3245.42,1988.32) PA31(3166.68,2067.06) PA32(3166.68,1988.32) PA33(3087.94,2067.06) PA34(3087.94,1988.32) PA35(3009.2,2067.06) PA36(3009.2,1988.32) PA37(2930.46,2067.06) PA38(2930.46,1988.32) PA39(2851.72,2067.06) PA40(2851.72,1988.32) PA41(2772.98,2067.06) PA42(2772.98,1988.32) PA43(2694.24,2067.06) PA44(2694.24,1988.32) PA45(2615.5,2067.06) PA46(2615.5,1988.32) PA47(2536.76,2067.06) PA48(2536.76,1988.32) PA49(2458.02,2067.06) PA50(2458.02,1988.32) PA51(2379.28,2067.06) PA52(2379.28,1988.32) PA53(2300.54,2067.06) PA54(2300.54,1988.32) PA55(2221.8,2067.06) PA56(2221.8,1988.32) PC2(2221.8,3917.45) PC3(2300.54,3838.71) PC4(2300.54,3917.45) PC5(2379.28,3838.71) PC6(2379.28,3917.45) PC7(2458.02,3838.71) PC8(2458.02,3917.45) PC9(2536.76,3838.71) PC10(2536.76,3917.45) PC11(2615.5,3838.71) PC12(2615.5,3917.45) PC13(2694.24,3838.71) PC14(2694.24,3917.45) PC15(2772.98,3838.71) PC16(2772.98,3917.45) PC17(2851.72,3838.71) PC18(2851.72,3917.45) PC19(2930.46,3838.71) PC20(2930.46,3917.45) PC21(3009.2,3838.71) PC22(3009.2,3917.45) PC23(3087.94,3838.71) PC24(3087.94,3917.45) PC25(3166.68,3838.71) PC26(3166.68,3917.45) PC27(3245.42,3838.71) PC28(3245.42,3917.45) PC29(3324.16,3838.71) PC30(3324.16,3917.45) PC31(3402.9,3838.71) PC32(3402.9,3917.45) PC33(3481.64,3838.71) PC34(3481.64,3917.45) PC35(3560.38,3838.71) PC36(3560.38,3917.45) PC37(3639.12,3838.71) PC38(3639.12,3917.45) PC39(3717.86,3838.71) PC40(3717.86,3917.45) PC41(3796.6,3838.71) PC42(3796.6,3917.45) PC43(3875.34,3838.71) PC44(3875.34,3917.45) PC45(3954.08,3838.71) PC46(3954.08,3917.45) PC47(4032.82,3838.71) PC48(4032.82,3917.45) PC49(4111.56,3838.71) PC50(4111.56,3917.45) PC51(4190.3,3838.71) PC52(4190.3,3917.45) PC53(4269.04,3838.71) PC54(4269.04,3917.45) PC55(4347.78,3838.71) PC56(4347.78,3917.45)
  rect 50x50 hole 27.56: PB1(2084,2008)
  round 50 hole 27.56: PB2(2005.26,2008) PB3(2084,2086.74) PB4(2005.26,2086.74) PB5(2084,2165.48) PB6(2005.26,2165.48) PB7(2084,2244.22) PB8(2005.26,2244.22) PB9(2084,2322.96) PB10(2005.26,2322.96) PB11(2084,2401.7) PB12(2005.26,2401.7) PB13(2084,2480.44) PB14(2005.26,2480.44) PB15(2084,2559.18) PB16(2005.26,2559.18) PB17(2084,2637.92) PB18(2005.26,2637.92) PB19(2084,2716.66) PB20(2005.26,2716.66) PB21(2084,2795.4) PB22(2005.26,2795.4) PB23(2084,2874.14) PB24(2005.26,2874.14) PB25(2084,2952.88) PB26(2005.26,2952.88) PB27(2084,3031.62) PB28(2005.26,3031.62) PB29(2084,3110.36) PB30(2005.26,3110.36) PB31(2084,3189.1) PB32(2005.26,3189.1) PB33(2084,3267.84) PB34(2005.26,3267.84) PB35(2084,3346.58) PB36(2005.26,3346.58) PB37(2084,3425.32) PB38(2005.26,3425.32) PB39(2084,3504.06) PB40(2005.26,3504.06) PB41(2084,3582.8) PB42(2005.26,3582.8) PB43(2084,3661.54) PB44(2005.26,3661.54) PB45(2084,3740.28) PB46(2005.26,3740.28) PB47(2084,3819.02) PB48(2005.26,3819.02) PB49(2084,3897.76) PB50(2005.26,3897.76)

## Via types
v1: diameter 16, hole 10, Top Layer to Bottom Layer, tented both sides, 638 vias
v2: diameter 30, hole 18, Top Layer to Bottom Layer, tented both sides, 56 vias
v3: diameter 16, hole 10, Top Layer to Bottom Layer, 2 vias
v4: diameter 30, hole 16, Top Layer to Bottom Layer, tented both sides, 1 vias

## Nets (pads, with @x,y where several pads share a name; then routed paths per layer and width w, separated by ;. In a path a pad name is that pad's centre, name@x,y a point inside that pad or via, vN(x,y) a via of type N, cw(c..) or ccw(c..) an arc to the next point about the centre after c; other vN are vias at no path point)
AIN0: pad.PA35 U1.R14 | length 1833.8
  Top Layer w5: v1@2631.93,2588.4 U1.R14@2647.68,2603.96 ; v1@2634.03,2590.03 U1.R14@2655.22,2596.42 ; v1@2636.26,2590.5 ccw(c2636.26,2603.78) 2645.65,2594.39 ccw(c2655.03,2585) v1@2641.76,2585 ; v1@2639.66,2580.68 U1.R14@2655.22,2596.42 ; v1@2641.28,2582.77 U1.R14@2647.68,2603.96 ; U1.R14@2646.54,2600.65 cw(c2633.56,2600.65) 2642.74,2591.48 cw(c2651.91,2582.31) U1.R14@2651.91,2595.28 ; v1(2636.26,2585) U1.R14@2651.91,2600.65 ; v1(2636.26,2585) U1.R14@2647.68,2603.96 ; v1(2636.26,2585) U1.R14@2655.22,2596.42 ; v1(2636.26,2585) U1.R14@2651.91,2600.65 ; U1.R14@2651.91,2600.65 2640.6,2581.62 U1.R14@2651.91,2600.65 ; U1.R14@2651.91,2600.65 2632.88,2589.34 U1.R14@2651.91,2600.65
  SIGNAL_2 w5: v1@2630.76,2585 cw(c2617.48,2585) 2626.87,2575.61 cw(c2636.26,2566.22) v1@2636.26,2579.5 ; v1@2631.98,2588.46 2617.65,2566.39 ; v1@2639.72,2580.73 2617.65,2566.39 ; 2967.36,2105.51 ccw(c3009.2,2147.34) pad.PA35@3009.2,2088.18 ; 2975.53,2097.34 cw(c2945.25,2067.06) pad.PA35@2988.07,2067.06 ; 2975.9,2096.97 ccw(c3009.2,2130.27) pad.PA35@3009.2,2083.18 ; 2984.07,2088.8 cw(c2962.32,2067.06) pad.PA35@2993.07,2067.06 ; 2984.43,2088.43 ccw(c3009.2,2113.2) pad.PA35@3009.2,2078.18 ; pad.PA35@2991.91,2054.92 2973.84,2099.03 ; pad.PA35@2996.52,2057.1 2973.84,2099.03 ; pad.PA35@3000.82,2059.73 2973.84,2099.03 ; pad.PA35@3004.81,2062.79 2973.84,2099.03 ; pad.PA35@3013,2071.85 2973.84,2099.03 ; pad.PA35@3015.64,2076.12 2973.84,2099.03 ; pad.PA35@3017.83,2080.67 2973.84,2099.03 ; pad.PA35@3019.54,2085.47 2973.84,2099.03 ; 2617.65,2566.39 v1(2636.26,2585) 2610,2558.74 2610,2235.5 2650.5,2195 2774.75,2195 2838.25,2131.5 2941.37,2131.5 3005.81,2067.06 pad.PA35@3009.2,2067.06 2973.84,2099.03
AIN1: pad.PA36 U1.U17 | length 1609.9
  Top Layer w5: v1@2583.46,2472.66 2588.92,2495 v1@2594.38,2472.66 ; U1.U17@2583.58,2505.53 2588.92,2483.29 U1.U17@2594.25,2505.53 ; v1@2585.03,2475.89 ccw(c2575.64,2485.28) 2588.92,2485.28 ccw(c2602.19,2485.28) v1@2592.81,2475.89 ; U1.U17@2585.12,2502.36 cw(c2575.94,2493.19) 2588.92,2493.19 cw(c2601.89,2493.19) U1.U17@2592.72,2502.36 ; v1(2588.92,2472) U1.U17@2588.92,2506.16
  SIGNAL_2 w5: v1@2583.46,2471.34 2588.92,2449 ; v1@2585.03,2468.11 cw(c2575.64,2458.72) 2588.92,2458.72 cw(c2602.19,2458.72) v1@2592.81,2468.11 ; v1@2594.38,2471.34 2588.92,2449 ; pad.PA36@2988.07,1988.32 ccw(c2937.08,1988.32) 2973.14,2024.37 ccw(c3009.2,2060.43) pad.PA36@3009.2,2009.44 ; pad.PA36@2991.36,1977 2974.97,2022.54 ; pad.PA36@2993.07,1988.32 ccw(c2954.15,1988.32) 2981.67,2015.84 ccw(c3009.2,2043.36) pad.PA36@3009.2,2004.44 ; pad.PA36@2996.06,1978.97 2974.97,2022.54 ; pad.PA36@2998.07,1988.32 ccw(c2971.22,1988.32) 2990.21,2007.3 ccw(c3009.2,2026.29) pad.PA36@3009.2,1999.44 ; pad.PA36@3000.48,1981.41 2974.97,2022.54 ; pad.PA36@3004.6,1984.27 2974.97,2022.54 ; pad.PA36@3009.2,1988.32 2965,2032.51 2965,2076.53 2930.03,2111.5 2829.97,2111.5 2756.47,2185 2644,2185 2588.92,2240.08 v1(2588.92,2472) 2588.92,2449 ; pad.PA36@3013.24,1992.91 2974.97,2022.54 ; pad.PA36@3016.11,1997.03 2974.97,2022.54 ; pad.PA36@3018.54,2001.46 2974.97,2022.54 ; pad.PA36@3020.51,2006.15 2974.97,2022.54
AIN2: pad.PA33 U1.R15 | length 1377.8
  Top Layer w5: U1.R15@2651.91,2563.78 cw(c2651.91,2550.81) 2661.08,2559.98 cw(c2670.26,2569.16) U1.R15@2657.28,2569.16 ; v1@2662.5,2553.07 ccw(c2649.22,2553.07) 2658.61,2562.46 ccw(c2668,2571.85) v1@2668,2558.57 ; v1@2662.99,2550.79 U1.R15@2656.13,2572.48 ; v1@2663.67,2549.68 U1.R15@2651.91,2569.16 ; v1@2664.59,2548.76 U1.R15@2648.59,2564.94 ; v1@2670.28,2558.07 U1.R15@2648.59,2564.94 ; v1@2671.39,2557.4 U1.R15@2651.91,2569.16 ; v1@2672.31,2556.48 U1.R15@2656.13,2572.48 ; U1.R15@2648.59,2564.94 v1(2668,2553.07) ; U1.R15@2648.59,2564.94 v1(2668,2553.07) ; U1.R15@2651.91,2569.16 v1(2668,2553.07) ; U1.R15@2651.91,2569.16 v1(2668,2553.07) ; U1.R15@2656.13,2572.48 v1(2668,2553.07) ; U1.R15@2656.13,2572.48 v1(2668,2553.07)
  SIGNAL_2 w5: 2662.5,2526.51 cw(c2694.56,2526.51) v1@2671.89,2549.18 ; 2662.5,2538.58 cw(c2682.49,2538.58) v1@2668.35,2552.71 ; v1@2662.53,2553.65 2662.5,2527.25 ; v1@2673.23,2551.37 2662.5,2527.25 ; pad.PA33@3066.82,2067.06 ccw(c3015.82,2067.06) 3051.88,2103.11 ccw(c3087.94,2139.17) pad.PA33@3087.94,2088.18 ; pad.PA33@3071.82,2067.06 ccw(c3032.89,2067.06) 3060.42,2094.58 ccw(c3087.94,2122.1) pad.PA33@3087.94,2083.18 ; pad.PA33@3076.82,2067.06 ccw(c3049.97,2067.06) 3068.95,2086.04 ccw(c3087.94,2105.03) pad.PA33@3087.94,2078.18 ; pad.PA33@3087.94,2067.06 3029.99,2125 2976.15,2125 2949.65,2151.5 2854.64,2151.5 2652.5,2353.64 2652.5,2488.35 2662.5,2498.35 2662.5,2547.57 v1(2668,2553.07) 2662.5,2527.25
AIN3: U1.P15
ALE: U1.D1 U2.17 | length 903.4
  Top Layer w5: U1.D1@2993.03,3010.73 2998.37,3032.98 U1.D1@3003.7,3010.73 ; U1.D1@2994.57,3013.9 ccw(c2985.39,3023.08) 2998.37,3023.08 ccw(c3011.34,3023.08) U1.D1@3002.17,3013.9 ; U1.D1@2998.37,3010.1 2998.37,3557.37 3042.95,3601.95 U2.17@3240.83,3601.95 ; 3202.2,3601.95 U2.17@3222.13,3601.95 ; U2.17@3220.41,3600.24 ccw(c3216.28,3596.1) 3216.28,3601.95 ccw(c3216.28,3607.79) U2.17@3220.41,3603.66
CAM_HREF: pad.PB46 U1.G2 | length 2193
  Top Layer w5: pad.PB46@1994.58,3720.48 2041.61,3707.89 ; pad.PB46@1996.15,3725.34 2041.61,3707.89 ; pad.PB46@1998.21,3729.96 2041.61,3707.89 ; pad.PB46@2000.72,3734.32 2041.61,3707.89 ; pad.PB46@2006.02,3727.81 cw(c2008.01,3694.97) 2031.27,3718.23 ; pad.PB46@2006.32,3722.82 cw(c2008.9,3680.16) 2039.12,3710.38 ; pad.PB46@2010.67,3745.48 2041.61,3707.89 ; pad.PB46@2014.71,3748.47 2041.61,3707.89 ; pad.PB46@2019.06,3751.04 2041.61,3707.89 ; pad.PB46@2022.76,3740.28 ccw(c2055.46,3740.28) 2032.34,3717.16 ; pad.PB46@2023.71,3753.17 2041.61,3707.89 ; pad.PB46@2027.76,3740.28 ccw(c2072.53,3740.28) 2040.87,3708.63 ; U1.G2@2900.55,2982.83 2920,2994.73 ; U1.G2@2903.88,2978.61 2920,2994.73 ; U1.G2@2903.88,2983.98 ccw(c2903.88,2996.95) 2913.05,2987.78 ccw(c2922.23,2978.61) U1.G2@2909.25,2978.61 ; U1.G2@2908.1,2975.28 2920,2994.73 ; 2041.61,3707.89 pad.PB46@2005.26,3740.28 2009.22,3740.28 2045,3704.5 2045,3403 2064,3384 2100,3384 2116.5,3367.5 2116.5,3273 2146.5,3243 2817.97,3243 2860,3200.97 2860,3078.86 2920,3018.86 2920,2994.73
CAM_PCLK: pad.PB44 U1.G5 | length 2490.8
  Top Layer w5: U1.G5@2903.88,2889.49 ccw(c2903.88,2902.47) 2913.05,2893.29 ccw(c2922.23,2884.12) U1.G5@2909.25,2884.12 ; U1.G5@2909.34,2889.58 cw(c2919.38,2879.55) v1@2919.38,2893.74 ; 2910.26,2890.5 ccw(c2901.51,2899.24) v1@2913.88,2899.24 ; v1@2914.36,2901.49 U1.G5@2908.13,2880.83 ; v1@2915.07,2902.66 U1.G5@2903.88,2884.12 ; v1@2916.04,2903.61 U1.G5@2900.59,2888.37 ; v1@2921.51,2894.17 U1.G5@2900.59,2888.37 ; v1@2922.69,2894.85 U1.G5@2903.88,2884.12 ; v1@2923.67,2895.8 U1.G5@2908.13,2880.83 ; U1.G5@2900.59,2888.37 v1(2919.38,2899.24) ; U1.G5@2900.59,2888.37 v1@2919,2899.24 ; U1.G5@2903.88,2884.12 v1(2919.38,2899.24) ; U1.G5@2903.88,2884.12 v1@2919,2899.24 ; U1.G5@2908.13,2880.83 v1(2919.38,2899.24) ; U1.G5@2908.13,2880.83 v1@2919,2899.24 ; v1@2919,2899.24 v1(2919.38,2899.24)
  SIGNAL_2 w5: pad.PB44@1993.31,3642.48 2040.87,3625.94 ; pad.PB44@1995.22,3647.21 2040.87,3625.94 ; pad.PB44@1997.59,3651.68 2040.87,3625.94 ; pad.PB44@2000.37,3655.86 2040.87,3625.94 ; pad.PB44@2005.26,3639.04 cw(c2005.26,3584.72) 2043.67,3623.13 cw(c2082.08,3661.54) pad.PB44@2027.76,3661.54 ; pad.PB44@2005.26,3644.04 cw(c2005.26,3601.8) 2035.13,3631.67 cw(c2065.01,3661.54) pad.PB44@2022.76,3661.54 ; pad.PB44@2005.26,3649.04 cw(c2005.26,3618.87) 2026.6,3640.21 cw(c2047.94,3661.54) pad.PB44@2017.76,3661.54 ; pad.PB44@2005.26,3661.54 2045.8,3621 2091.77,3621 2227.5,3485.27 2227.5,3215.49 2290.89,3152.11 2839.32,3152.11 2933.5,3057.93 2933.5,3027.08 2934.5,3026.08 2934.5,2915.12 ; pad.PB44@2010.94,3666.44 2040.87,3625.94 ; pad.PB44@2015.13,3669.22 2040.87,3625.94 ; pad.PB44@2019.6,3671.58 2040.87,3625.94 ; pad.PB44@2024.32,3673.5 2040.87,3625.94 ; v1@2915.9,2903.5 2934.5,2915.12 ; v1@2919.38,2904.74 ccw(c2919.38,2916.19) 2927.48,2908.09 ; v1@2923.8,2895.98 2934.5,2915.12 ; v1@2924.88,2899.24 cw(c2939.98,2899.24) 2929.3,2909.92 ; 2934.5,2915.12 v1(2919.38,2899.24) 2919.38,2900 2934.5,2915.12
CAM_VSYNC: pad.PB45 U1.G7 | length 2824.2
  Top Layer w5: v1@2884.17,2809.14 U1.G7@2899.64,2824.43 ; v1@2886.31,2810.79 U1.G7@2907.18,2816.89 ; v1@2888.5,2811.25 ccw(c2888.5,2824.53) 2897.89,2815.14 ccw(c2907.28,2805.75) v1@2894,2805.75 ; v1@2891.9,2801.42 U1.G7@2907.18,2816.89 ; v1@2893.55,2803.56 U1.G7@2899.64,2824.43 ; U1.G7@2898.5,2821.13 cw(c2885.53,2821.13) 2894.7,2811.95 cw(c2903.88,2802.78) U1.G7@2903.88,2815.75 ; v1(2888.5,2805.75) U1.G7@2903.88,2821.13 ; v1(2888.5,2805.75) U1.G7@2899.64,2824.43 ; v1(2888.5,2805.75) U1.G7@2907.18,2816.89 ; v1(2888.5,2805.75) U1.G7@2903.88,2821.13 ; U1.G7@2903.88,2821.13 2892.85,2802.39 U1.G7@2903.88,2821.13 ; U1.G7@2903.88,2821.13 2885.14,2810.1 U1.G7@2903.88,2821.13
  SIGNAL_2 w5: v1@2117.54,3541.23 2139.61,3526.89 v1@2125.27,3548.96 ; v1@2121,3540 cw(c2121,3526.72) 2130.39,3536.11 cw(c2139.78,3545.5) v1@2126.5,3545.5 ; v1(2121,3545.5) 2207.5,3459 2207.5,3207.21 2282.6,3132.11 2831.03,3132.11 2904,3059.14 2904,3020.08 2903.5,3019.58 2903.5,2820.75 ; v1@2885.15,2810.11 2903.5,2820.75 ; v1(2888.5,2805.75) 2903.5,2820.75 ; v1@2888.5,2811.25 ccw(c2888.5,2824.53) 2897.89,2815.14 ccw(c2907.28,2805.75) v1@2894,2805.75 ; v1@2892.86,2802.4 2903.5,2820.75
  Bottom Layer w5: pad.PB45@2061.5,3740.28 cw(c2007.18,3740.28) 2045.59,3701.87 cw(c2084,3663.46) pad.PB45@2084,3717.78 ; pad.PB45@2064.94,3752.24 2048.39,3704.68 ; pad.PB45@2066.5,3740.28 cw(c2024.25,3740.28) 2054.13,3710.41 cw(c2084,3680.54) pad.PB45@2084,3722.78 ; pad.PB45@2069.66,3750.32 2048.39,3704.68 ; pad.PB45@2071.5,3740.28 cw(c2041.32,3740.28) 2062.66,3718.95 cw(c2084,3697.61) pad.PB45@2084,3727.78 ; pad.PB45@2074.13,3747.96 2048.39,3704.68 ; pad.PB45@2078.32,3745.18 2048.39,3704.68 ; pad.PB45@2084,3740.28 2045,3701.28 2045,3561 2055.7,3550.3 2116.2,3550.3 v1(2121,3545.5) 2095.91,3550.3 ; pad.PB45@2088.89,3734.6 2048.39,3704.68 ; pad.PB45@2091.67,3730.42 2048.39,3704.68 ; pad.PB45@2094.04,3725.95 2048.39,3704.68 ; pad.PB45@2095.95,3721.22 2048.39,3704.68 ; 2096.12,3550.3 cw(c2096.12,3520.62) v1@2117.11,3541.61 ; 2108.2,3550.3 cw(c2108.2,3532.7) v1@2120.65,3545.15 ; v1@2119.39,3540.24 2095.91,3550.3 ; v1@2121.45,3550.98 2095.91,3550.3
CAMCLK: pad.PB43 U1.J3 | length 2730
  Top Layer w5: v1@2820.66,2934.38 U1.J3@2836.66,2950.43 ; v1@2822.7,2935.99 U1.J3@2844.2,2942.88 ; v1@2825,2936.5 ccw(c2825,2949.24) 2834.01,2940.23 ; v1@2828.44,2926.71 U1.J3@2844.2,2942.88 ; v1@2830.02,2928.76 U1.J3@2836.66,2950.43 ; v1@2830.5,2931 cw(c2844.32,2931) 2834.55,2940.77 ; U1.J3@2835.51,2947.11 cw(c2822.54,2947.11) 2831.71,2937.94 cw(c2840.89,2928.76) U1.J3@2840.89,2941.74 ; v1(2825,2931) U1.J3@2840.89,2947.11 ; v1(2825,2931) U1.J3@2836.66,2950.43 ; v1(2825,2931) U1.J3@2844.2,2942.88 ; v1(2825,2931) U1.J3@2840.89,2947.11 ; v1@2825,2931.22 U1.J3@2840.89,2947.11 ; v1@2825,2931.22 U1.J3@2836.66,2950.43 ; v1@2825,2931.22 U1.J3@2844.2,2942.88 ; v1@2825,2931.22 U1.J3@2840.89,2947.11 ; U1.J3@2840.89,2947.11 2829.36,2927.64 U1.J3@2840.89,2947.11 ; U1.J3@2840.89,2947.11 2821.58,2935.31 U1.J3@2840.89,2947.11
  SIGNAL_2 w5: 2054.87,3690.67 cw(c2026.77,3662.57) pad.PB43@2066.5,3661.86 ; 2054.87,3690.68 ccw(c2082.97,3718.78) pad.PB43@2083.69,3679.04 ; pad.PB43@2061.5,3661.95 ccw(c2010.41,3662.87) 2046.55,3699 ; pad.PB43@2064.94,3649.59 2048.39,3697.15 ; pad.PB43@2069.66,3651.51 2048.39,3697.15 ; pad.PB43@2071.5,3661.77 ccw(c2043.12,3662.28) 2063.19,3682.35 ccw(c2083.26,3702.42) pad.PB43@2083.78,3674.04 ; pad.PB43@2074.13,3653.87 2048.39,3697.15 ; pad.PB43@2078.32,3656.65 2048.39,3697.15 ; pad.PB43@2083.6,3684.04 cw(c2082.68,3735.13) 2046.55,3699 ; pad.PB43@2088.89,3667.23 2048.39,3697.15 ; pad.PB43@2091.67,3671.41 2048.39,3697.15 ; pad.PB43@2094.04,3675.88 2048.39,3697.15 ; pad.PB43@2095.95,3680.61 2048.39,3697.15 ; v1@2819.5,2931 ccw(c2806.22,2931) 2815.61,2940.39 ccw(c2825,2949.78) v1@2825,2936.5 ; v1@2820.65,2927.63 2809.5,2946.5 ; v1@2828.37,2935.35 2809.5,2946.5 ; 2046.54,3699 1990,3699 1968,3677 1968,3490 1988,3470 2103,3470 2167.5,3405.5 2167.5,3190.64 2266.03,3092.11 2756.03,3092.11 2809.5,3038.64 2809.5,2946.5 ; 2046.54,3699 pad.PB43@2084,3661.54 2048.39,3697.15 ; 2809.5,2946.5 v1(2825,2931) 2809.5,2946.5
CAMDATA0: pad.PB42 U1.H6 | length 2163.7
  Top Layer w5: U1.H6@2872.38,2858 ccw(c2872.38,2870.97) 2881.56,2861.8 ccw(c2890.73,2852.62) U1.H6@2877.76,2852.62 ; v1@2882.5,2868.24 cw(c2869.22,2868.24) 2878.61,2858.85 cw(c2888,2849.46) v1@2888,2862.74 ; v1@2882.97,2870.47 U1.H6@2876.62,2849.31 ; v1@2883.66,2871.61 U1.H6@2872.38,2852.62 ; v1@2884.6,2872.56 U1.H6@2869.07,2856.86 ; v1@2890.23,2863.21 U1.H6@2869.07,2856.86 ; v1@2891.37,2863.9 U1.H6@2872.38,2852.62 ; v1@2892.32,2864.84 U1.H6@2876.62,2849.31 ; U1.H6@2869.07,2856.86 v1(2888,2868.24) ; U1.H6@2869.07,2856.86 v1(2888,2868.24) ; U1.H6@2872.38,2852.62 v1(2888,2868.24) ; U1.H6@2872.38,2852.62 v1(2888,2868.24) ; U1.H6@2876.62,2849.31 v1(2888,2868.24) ; U1.H6@2876.62,2849.31 v1(2888,2868.24)
  SIGNAL_2 w5: v1@2126.04,3481.73 2148.11,3467.39 v1@2133.77,3489.46 ; v1@2129.5,3480.5 cw(c2129.5,3467.22) 2138.89,3476.61 cw(c2148.28,3486) v1@2135,3486 ; v1(2129.5,3486) 2187.5,3428 2187.5,3198.93 2274.32,3112.11 2801.89,3112.11 v1(2855,3059) ; v1@2849.5,3059 ccw(c2836.22,3059) 2845.61,3068.39 ccw(c2855,3077.78) v1@2855,3064.5
  Bottom Layer w5: pad.PB42@2005.26,3560.3 cw(c2005.26,3505.98) 2043.67,3544.39 cw(c2082.08,3582.8) pad.PB42@2027.76,3582.8 ; pad.PB42@2005.26,3565.3 cw(c2005.26,3523.06) 2035.13,3552.93 cw(c2065.01,3582.8) pad.PB42@2022.76,3582.8 ; pad.PB42@2005.26,3570.3 cw(c2005.26,3540.13) 2026.6,3561.47 cw(c2047.94,3582.8) pad.PB42@2017.76,3582.8 ; pad.PB42@2005.26,3582.8 2047.76,3540.3 2093.72,3540.3 2129.5,3504.53 ; v1@2124.06,3486.82 2129.5,3504.53 ; v1@2125.61,3489.89 ccw(c2116.22,3499.28) 2129.5,3499.28 ccw(c2142.78,3499.28) v1@2133.39,3489.89 ; v1(2129.5,3486) 2129.5,3504.53 ; v1@2134.94,3486.82 2129.5,3504.53 ; v1@2849.54,3058.34 2855,3036 ; v1@2851.11,3055.11 cw(c2841.72,3045.72) 2855,3045.72 cw(c2868.28,3045.72) v1@2858.89,3055.11 ; v1@2860.46,3058.34 2855,3036 ; v1(2888,2868.24) 2872.5,2883.74 2872.5,2947 2855,2964.5 v1(2855,3059) 2855,3036
CAMDATA1: pad.PB41 U1.G3 | length 1694
  Top Layer w5: U1.G3@2903.88,2952.48 ccw(c2903.88,2965.46) 2913.05,2956.28 ccw(c2922.23,2947.11) U1.G3@2909.25,2947.11 ; U1.G3@2909.07,2952.3 ccw(c2898.37,2963) v1@2913.5,2963 ; 2910.92,2954.15 cw(c2919,2946.08) v1@2919,2957.5 ; v1@2913.91,2965.09 U1.G3@2908.13,2943.82 ; v1@2914.57,2966.26 U1.G3@2903.88,2947.11 ; v1@2915.5,2967.24 U1.G3@2900.59,2951.36 ; v1@2921.33,2958.02 U1.G3@2900.59,2951.36 ; v1@2922.48,2958.74 U1.G3@2903.88,2947.11 ; v1@2923.41,2959.71 U1.G3@2908.13,2943.82 ; U1.G3@2900.59,2951.36 v1(2919,2963) ; U1.G3@2900.59,2951.36 v1@2919,2962.23 ; U1.G3@2903.88,2947.11 v1(2919,2963) ; U1.G3@2903.88,2947.11 v1@2919,2962.23 ; U1.G3@2908.13,2943.82 v1(2919,2963) ; U1.G3@2908.13,2943.82 v1@2919,2962.23 ; v1@2919,2962.23 v1(2919,2963)
  SIGNAL_2 w5: pad.PB41@2084,3582.8 2105.62,3582.8 2217.5,3470.92 2217.5,3211.35 2286.74,3142.11 2835.18,3142.11 2920,3057.28 2920,2964 v1(2919,2963) 2920,2986.06 ; v1@2913.57,2963.89 2920,2986.06 ; v1@2915.11,2966.89 ccw(c2903.31,2978.69) 2920,2978.69 ; 2920,2973.86 ccw(c2929.86,2973.86) v1@2922.89,2966.89 ; v1@2924.48,2963.42 2920,2986.06
CAMDATA2: pad.PB40 U1.H5 | length 2398.9
  Top Layer w5: U1.H5@2872.38,2889.49 ccw(c2872.38,2902.47) 2881.56,2893.29 ccw(c2890.73,2884.12) U1.H5@2877.76,2884.12 ; v1@2882.5,2899.74 cw(c2869.22,2899.74) 2878.61,2890.35 cw(c2888,2880.96) v1@2888,2894.24 ; v1@2882.97,2901.96 U1.H5@2876.62,2880.81 ; v1@2883.66,2903.11 U1.H5@2872.38,2884.12 ; v1@2884.6,2904.06 U1.H5@2869.07,2888.35 ; v1@2890.23,2894.71 U1.H5@2869.07,2888.35 ; v1@2891.37,2895.39 U1.H5@2872.38,2884.12 ; v1@2892.32,2896.34 U1.H5@2876.62,2880.81 ; U1.H5@2869.07,2888.35 v1(2888,2899.74) ; U1.H5@2869.07,2888.35 v1(2888,2899.74) ; U1.H5@2872.38,2884.12 v1(2888,2899.74) ; U1.H5@2872.38,2884.12 v1(2888,2899.74) ; U1.H5@2876.62,2880.81 v1(2888,2899.74) ; U1.H5@2876.62,2880.81 v1(2888,2899.74)
  SIGNAL_2 w5: pad.PB40@1993.31,3523.13 2040.87,3539.67 ; pad.PB40@1995.22,3518.4 2040.87,3539.67 ; pad.PB40@1997.59,3513.93 2040.87,3539.67 ; pad.PB40@2000.37,3509.75 2040.87,3539.67 ; pad.PB40@2005.26,3504.06 2045.2,3544 2100.58,3544 2197.5,3447.08 2197.5,3203.07 2278.46,3122.11 2826.89,3122.11 2872.38,3076.62 2872.38,2915.35 ; pad.PB40@2005.26,3516.56 ccw(c2005.26,3546.74) 2026.6,3525.4 ccw(c2047.94,3504.06) pad.PB40@2017.76,3504.06 ; pad.PB40@2005.26,3521.56 ccw(c2005.26,3563.81) 2035.13,3533.94 ccw(c2065.01,3504.06) pad.PB40@2022.76,3504.06 ; pad.PB40@2005.26,3526.56 ccw(c2005.26,3580.88) 2043.67,3542.47 ccw(c2082.08,3504.06) pad.PB40@2027.76,3504.06 ; pad.PB40@2010.94,3499.17 2040.87,3539.67 ; pad.PB40@2015.13,3496.39 2040.87,3539.67 ; pad.PB40@2019.6,3494.03 2040.87,3539.67 ; pad.PB40@2024.32,3492.11 2040.87,3539.67 ; v1@2882.5,2899.74 ccw(c2869.22,2899.74) 2878.61,2909.13 ccw(c2888,2918.51) v1@2888,2905.24 ; v1@2883.66,2896.36 2872.38,2915.35 ; v1@2891.37,2904.08 2872.38,2915.35 ; 2872.38,2915.35 v1(2888,2899.74) 2872.38,2915.35
CAMDATA3: pad.PB39 U1.H4 | length 1672.6
  Top Layer w5: v1@2852.06,2928.34 U1.H4@2868.16,2912.29 ; v1@2854.09,2926.74 U1.H4@2875.7,2919.84 ; v1@2856.39,2926.24 cw(c2856.39,2913.26) 2865.56,2922.44 ; v1@2859.82,2936.03 U1.H4@2875.7,2919.84 ; v1@2861.4,2933.99 U1.H4@2868.16,2912.29 ; v1@2861.89,2931.74 ccw(c2875.47,2931.74) 2865.86,2922.13 ; U1.H4@2867.01,2915.61 ccw(c2854.03,2915.61) 2863.21,2924.79 ccw(c2872.38,2933.96) U1.H4@2872.38,2920.99 ; v1@2856.39,2931.61 U1.H4@2872.38,2915.61 ; v1@2856.39,2931.61 U1.H4@2875.7,2919.84 ; v1@2856.39,2931.61 U1.H4@2868.16,2912.29 ; v1@2856.39,2931.61 U1.H4@2872.38,2915.61 ; v1(2856.39,2931.74) U1.H4@2872.38,2915.61 ; v1(2856.39,2931.74) U1.H4@2875.7,2919.84 ; v1(2856.39,2931.74) U1.H4@2868.16,2912.29 ; v1(2856.39,2931.74) U1.H4@2872.38,2915.61 ; U1.H4@2872.38,2915.61 2852.98,2927.42 U1.H4@2872.38,2915.61 ; U1.H4@2872.38,2915.61 2860.73,2935.11 U1.H4@2872.38,2915.61
  SIGNAL_2 w5: pad.PB39@2084,3504.06 2177.5,3410.56 2177.5,3194.78 2270.18,3102.11 2797.75,3102.11 2832,3067.86 2832,3060.08 2856.39,3035.69 v1(2856.39,2931.74) v1@2856.26,2931.86 ; v1@2850.93,2932.39 2856.39,2954.74 v1@2861.85,2932.39 ; v1@2852.5,2935.63 ccw(c2843.11,2945.01) 2856.39,2945.01 ccw(c2869.66,2945.01) v1@2860.27,2935.63
CAMDATA4: pad.PB38 U1.H3 | length 2261.5
  Top Layer w5: U1.H3@2872.38,2952.48 ccw(c2872.38,2965.46) 2881.56,2956.28 ccw(c2890.73,2947.11) U1.H3@2877.76,2947.11 ; v1@2882.5,2962.73 cw(c2869.22,2962.73) 2878.61,2953.34 cw(c2888,2943.95) v1@2888,2957.23 ; v1@2882.97,2964.95 U1.H3@2876.62,2943.8 ; v1@2883.66,2966.1 U1.H3@2872.38,2947.11 ; v1@2884.6,2967.05 U1.H3@2869.07,2951.34 ; v1@2890.23,2957.7 U1.H3@2869.07,2951.34 ; v1@2891.37,2958.39 U1.H3@2872.38,2947.11 ; v1@2892.32,2959.33 U1.H3@2876.62,2943.8 ; U1.H3@2869.07,2951.34 v1(2888,2962.73) ; U1.H3@2869.07,2951.34 v1(2888,2962.73) ; U1.H3@2872.38,2947.11 v1(2888,2962.73) ; U1.H3@2872.38,2947.11 v1(2888,2962.73) ; U1.H3@2876.62,2943.8 v1(2888,2962.73) ; U1.H3@2876.62,2943.8 v1(2888,2962.73)
  Bottom Layer w5: pad.PB38@1993.73,3406 2037.76,3392.82 ; pad.PB38@1995.47,3410.82 2037.76,3392.82 ; pad.PB38@1997.71,3415.36 2037.76,3392.82 ; pad.PB38@2000.41,3419.6 2037.76,3392.82 ; pad.PB38@2005.26,3425.32 2037.76,3392.82 ; pad.PB38@2006.82,3412.92 cw(c2009.29,3393.25) 2023.31,3407.27 cw(c2037.34,3421.29) pad.PB38@2017.66,3423.76 ; pad.PB38@2007.44,3407.96 cw(c2010.91,3380.42) 2030.54,3400.05 cw(c2050.16,3419.67) pad.PB38@2022.62,3423.14 ; pad.PB38@2008.07,3403 cw(c2012.52,3367.59) 2037.76,3392.82 ; pad.PB38@2010.98,3430.18 2037.76,3392.82 ; pad.PB38@2015.22,3432.88 2037.76,3392.82 ; pad.PB38@2019.76,3435.11 2037.76,3392.82 ; pad.PB38@2024.58,3436.85 2037.76,3392.82 ; pad.PB38@2027.58,3422.51 ccw(c2062.99,3418.06) 2037.76,3392.82 ; 2632,3450 2672.5,3450 ; v1@2882.5,2962.73 ccw(c2869.22,2962.73) 2878.61,2972.12 ccw(c2888,2981.51) v1@2888,2968.23 ; v1@2883.7,2959.3 2870.5,2980.23 ; v1@2891.43,2967.03 2870.5,2980.23 ; 2037.76,3392.82 2165.46,3392.82 2222.64,3450 2672.5,3450 ; 2672.5,3450 2705.5,3450 2855,3300.5 2855,3083.86 2870.5,3068.36 2870.5,2980.23 ; 2870.5,2980.23 v1(2888,2962.73) 2870.5,2980.23
CAMDATA5: pad.PB37 U1.H7 | length 2436
  Top Layer w5: U1.H7@2872.38,2826.5 ccw(c2872.38,2839.47) 2881.56,2830.3 ccw(c2890.73,2821.13) U1.H7@2877.76,2821.13 ; v1@2882.5,2836.74 cw(c2869.22,2836.74) 2878.61,2827.35 cw(c2888,2817.97) v1@2888,2831.24 ; v1@2882.97,2838.97 U1.H7@2876.62,2817.82 ; v1@2883.66,2840.12 U1.H7@2872.38,2821.13 ; v1@2884.6,2841.07 U1.H7@2869.07,2825.36 ; v1@2890.23,2831.71 U1.H7@2869.07,2825.36 ; v1@2891.37,2832.4 U1.H7@2872.38,2821.13 ; v1@2892.32,2833.34 U1.H7@2876.62,2817.82 ; U1.H7@2869.07,2825.36 v1(2888,2836.74) ; U1.H7@2869.07,2825.36 v1(2888,2836.74) ; U1.H7@2872.38,2821.13 v1(2888,2836.74) ; U1.H7@2872.38,2821.13 v1(2888,2836.74) ; U1.H7@2876.62,2817.82 v1(2888,2836.74) ; U1.H7@2876.62,2817.82 v1(2888,2836.74)
  SIGNAL_1 w5: v1@2660.4,3462.09 2682.47,3447.76 v1@2668.14,3469.83 ; v1@2663.87,3460.87 cw(c2663.87,3447.59) 2673.25,3456.98 cw(c2682.64,3466.37) v1@2669.37,3466.37 ; v1(2663.87,3466.37) 2836.5,3293.73 2836.5,3054.86 2850.77,3040.59 2850.77,2970.73 2872.5,2949 2872.5,2852.24 ; v1@2882.5,2836.74 ccw(c2869.22,2836.74) 2878.61,2846.13 ccw(c2888,2855.52) v1@2888,2842.24 ; v1@2883.65,2833.37 2872.5,2852.24 ; v1@2891.37,2841.09 2872.5,2852.24 ; 2872.5,2852.24 v1(2888,2836.74) 2872.5,2852.24
  Bottom Layer w5: pad.PB37@2084,3425.32 2183.82,3425.32 2218.5,3460 2657.5,3460 v1(2663.87,3466.37) 2636.04,3460 ; pad.PB37@2084.7,3417.86 2124,3425.32 ; pad.PB37@2084.7,3432.79 2124,3425.32 ; pad.PB37@2085.95,3412.98 2124,3425.32 ; pad.PB37@2085.95,3437.67 2124,3425.32 ; pad.PB37@2087.83,3408.25 2124,3425.32 ; pad.PB37@2087.83,3442.4 2124,3425.32 ; pad.PB37@2090.33,3403.73 2124,3425.32 ; pad.PB37@2090.33,3446.91 2124,3425.32 ; pad.PB37@2092.84,3416.48 cw(c2114.18,3395.14) 2114.18,3425.32 cw(c2114.18,3455.5) pad.PB37@2092.84,3434.16 ; pad.PB37@2096.37,3412.95 cw(c2126.25,3383.07) 2126.25,3425.32 cw(c2126.25,3467.57) pad.PB37@2096.37,3437.7 ; pad.PB37@2099.91,3409.41 cw(c2138.32,3371) 2138.32,3425.32 cw(c2138.32,3479.64) pad.PB37@2099.91,3441.23 ; 2635.22,3460 ccw(c2635.22,3495.01) v1@2659.98,3470.25 ; 2647.29,3460 ccw(c2647.29,3482.94) v1@2663.51,3466.72 ; v1@2662.13,3471.58 2636.04,3460 ; v1@2664.57,3460.91 2636.04,3460